# Altium PCB etapa_1.PcbDoc (part 1 of 2)
Units mil, origin at the board's own origin, x right, y up, seen from the top; angles counter-clockwise.
Board outline 2040 x 2040 mil, 4 copper layers (Top Layer, Conexiones, Tierra, Bottom Layer); 184 components, 104 nets, 594 pads, 243 vias.
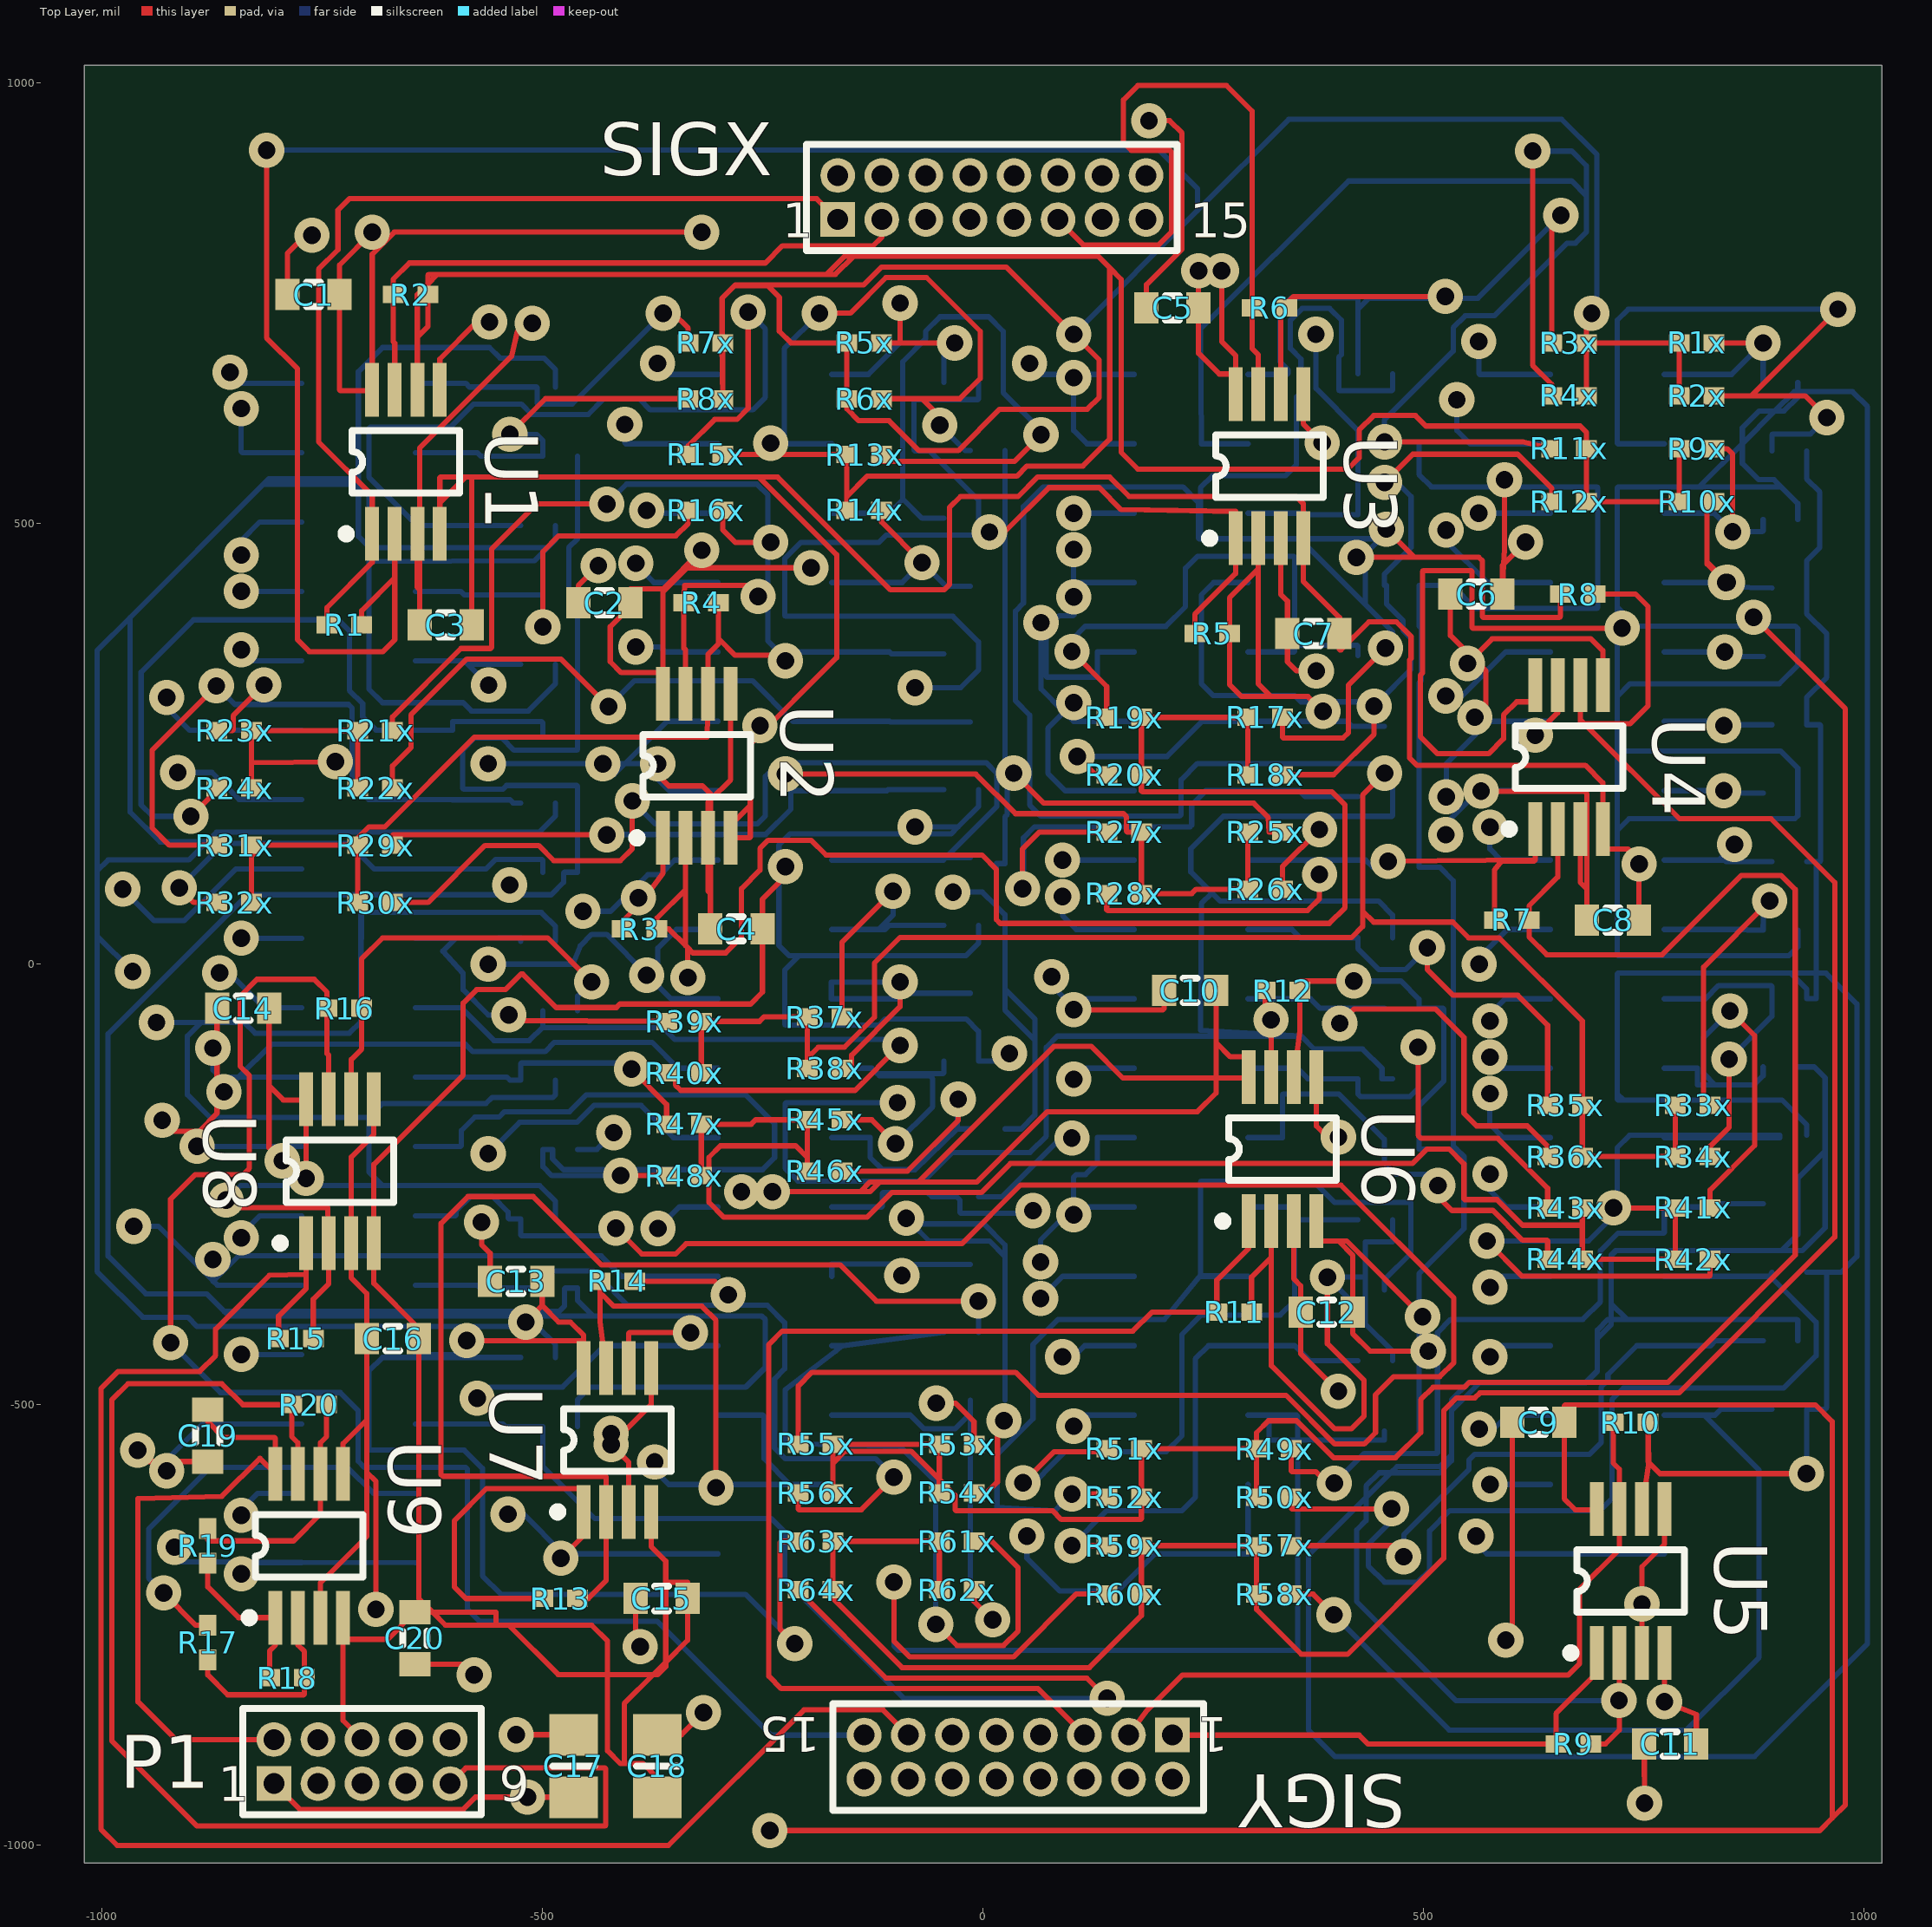
[diagram p0: Top Layer view]
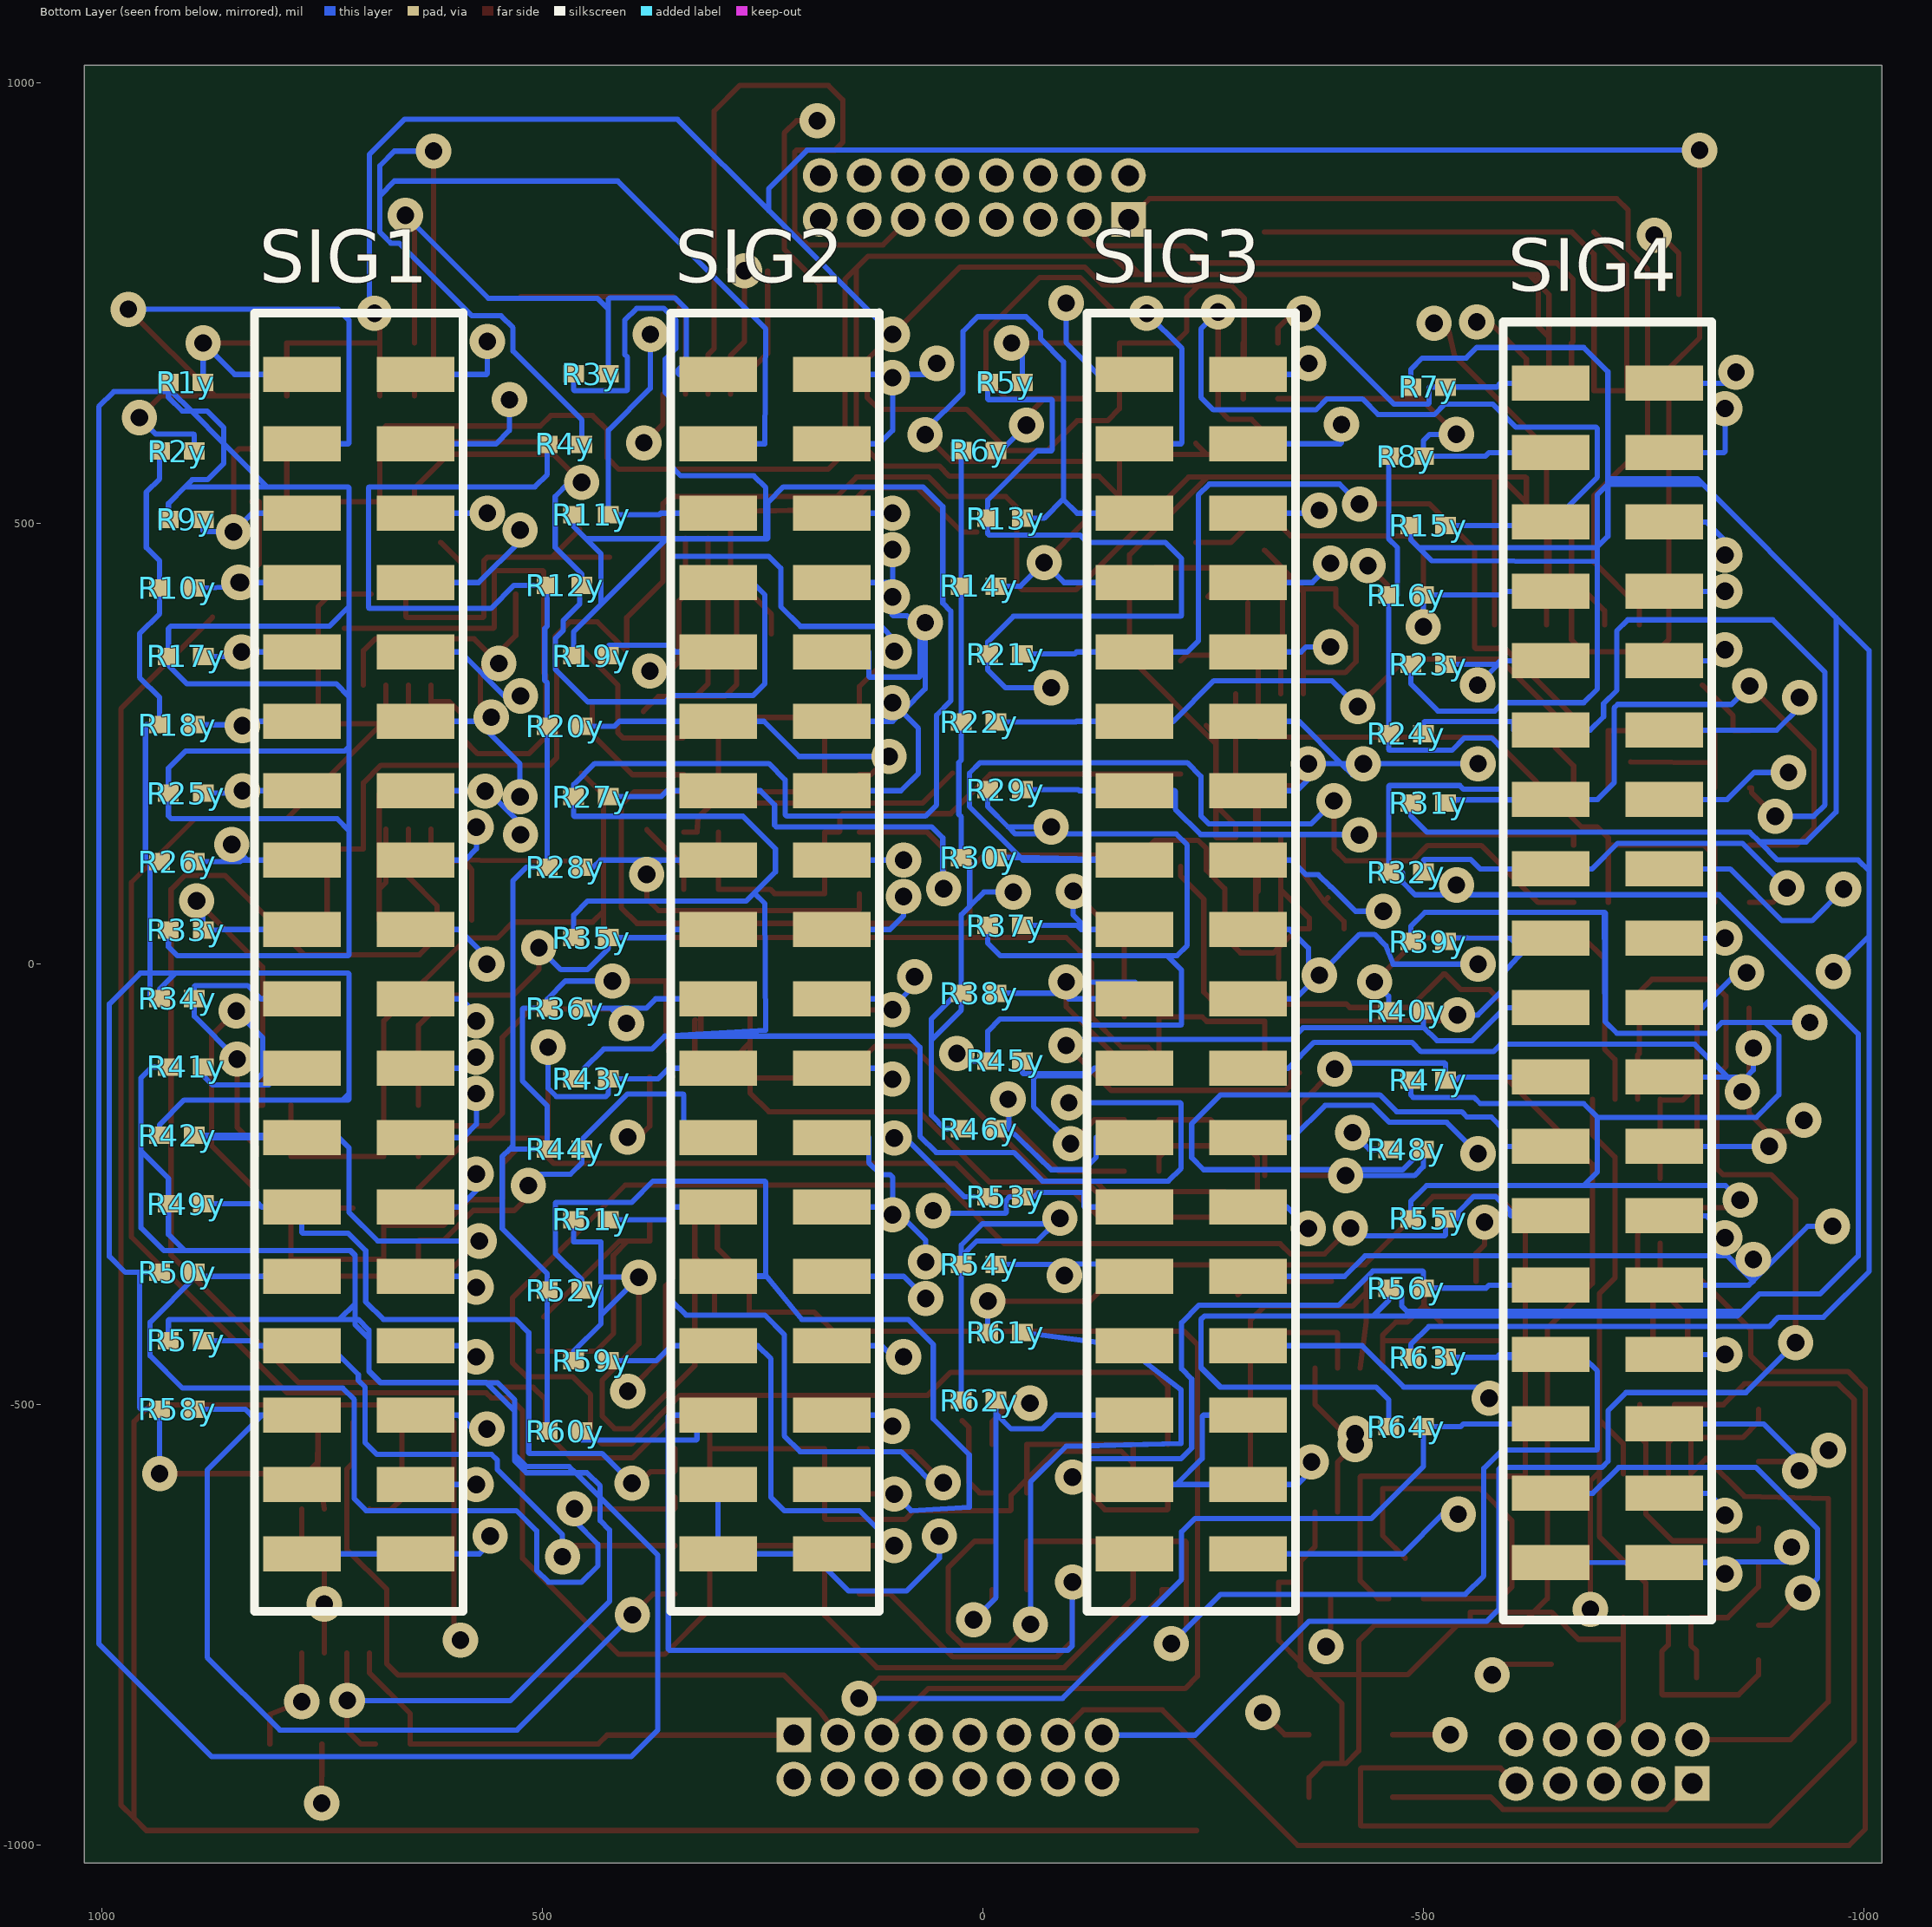
[diagram p1: Bottom Layer view, seen from below]
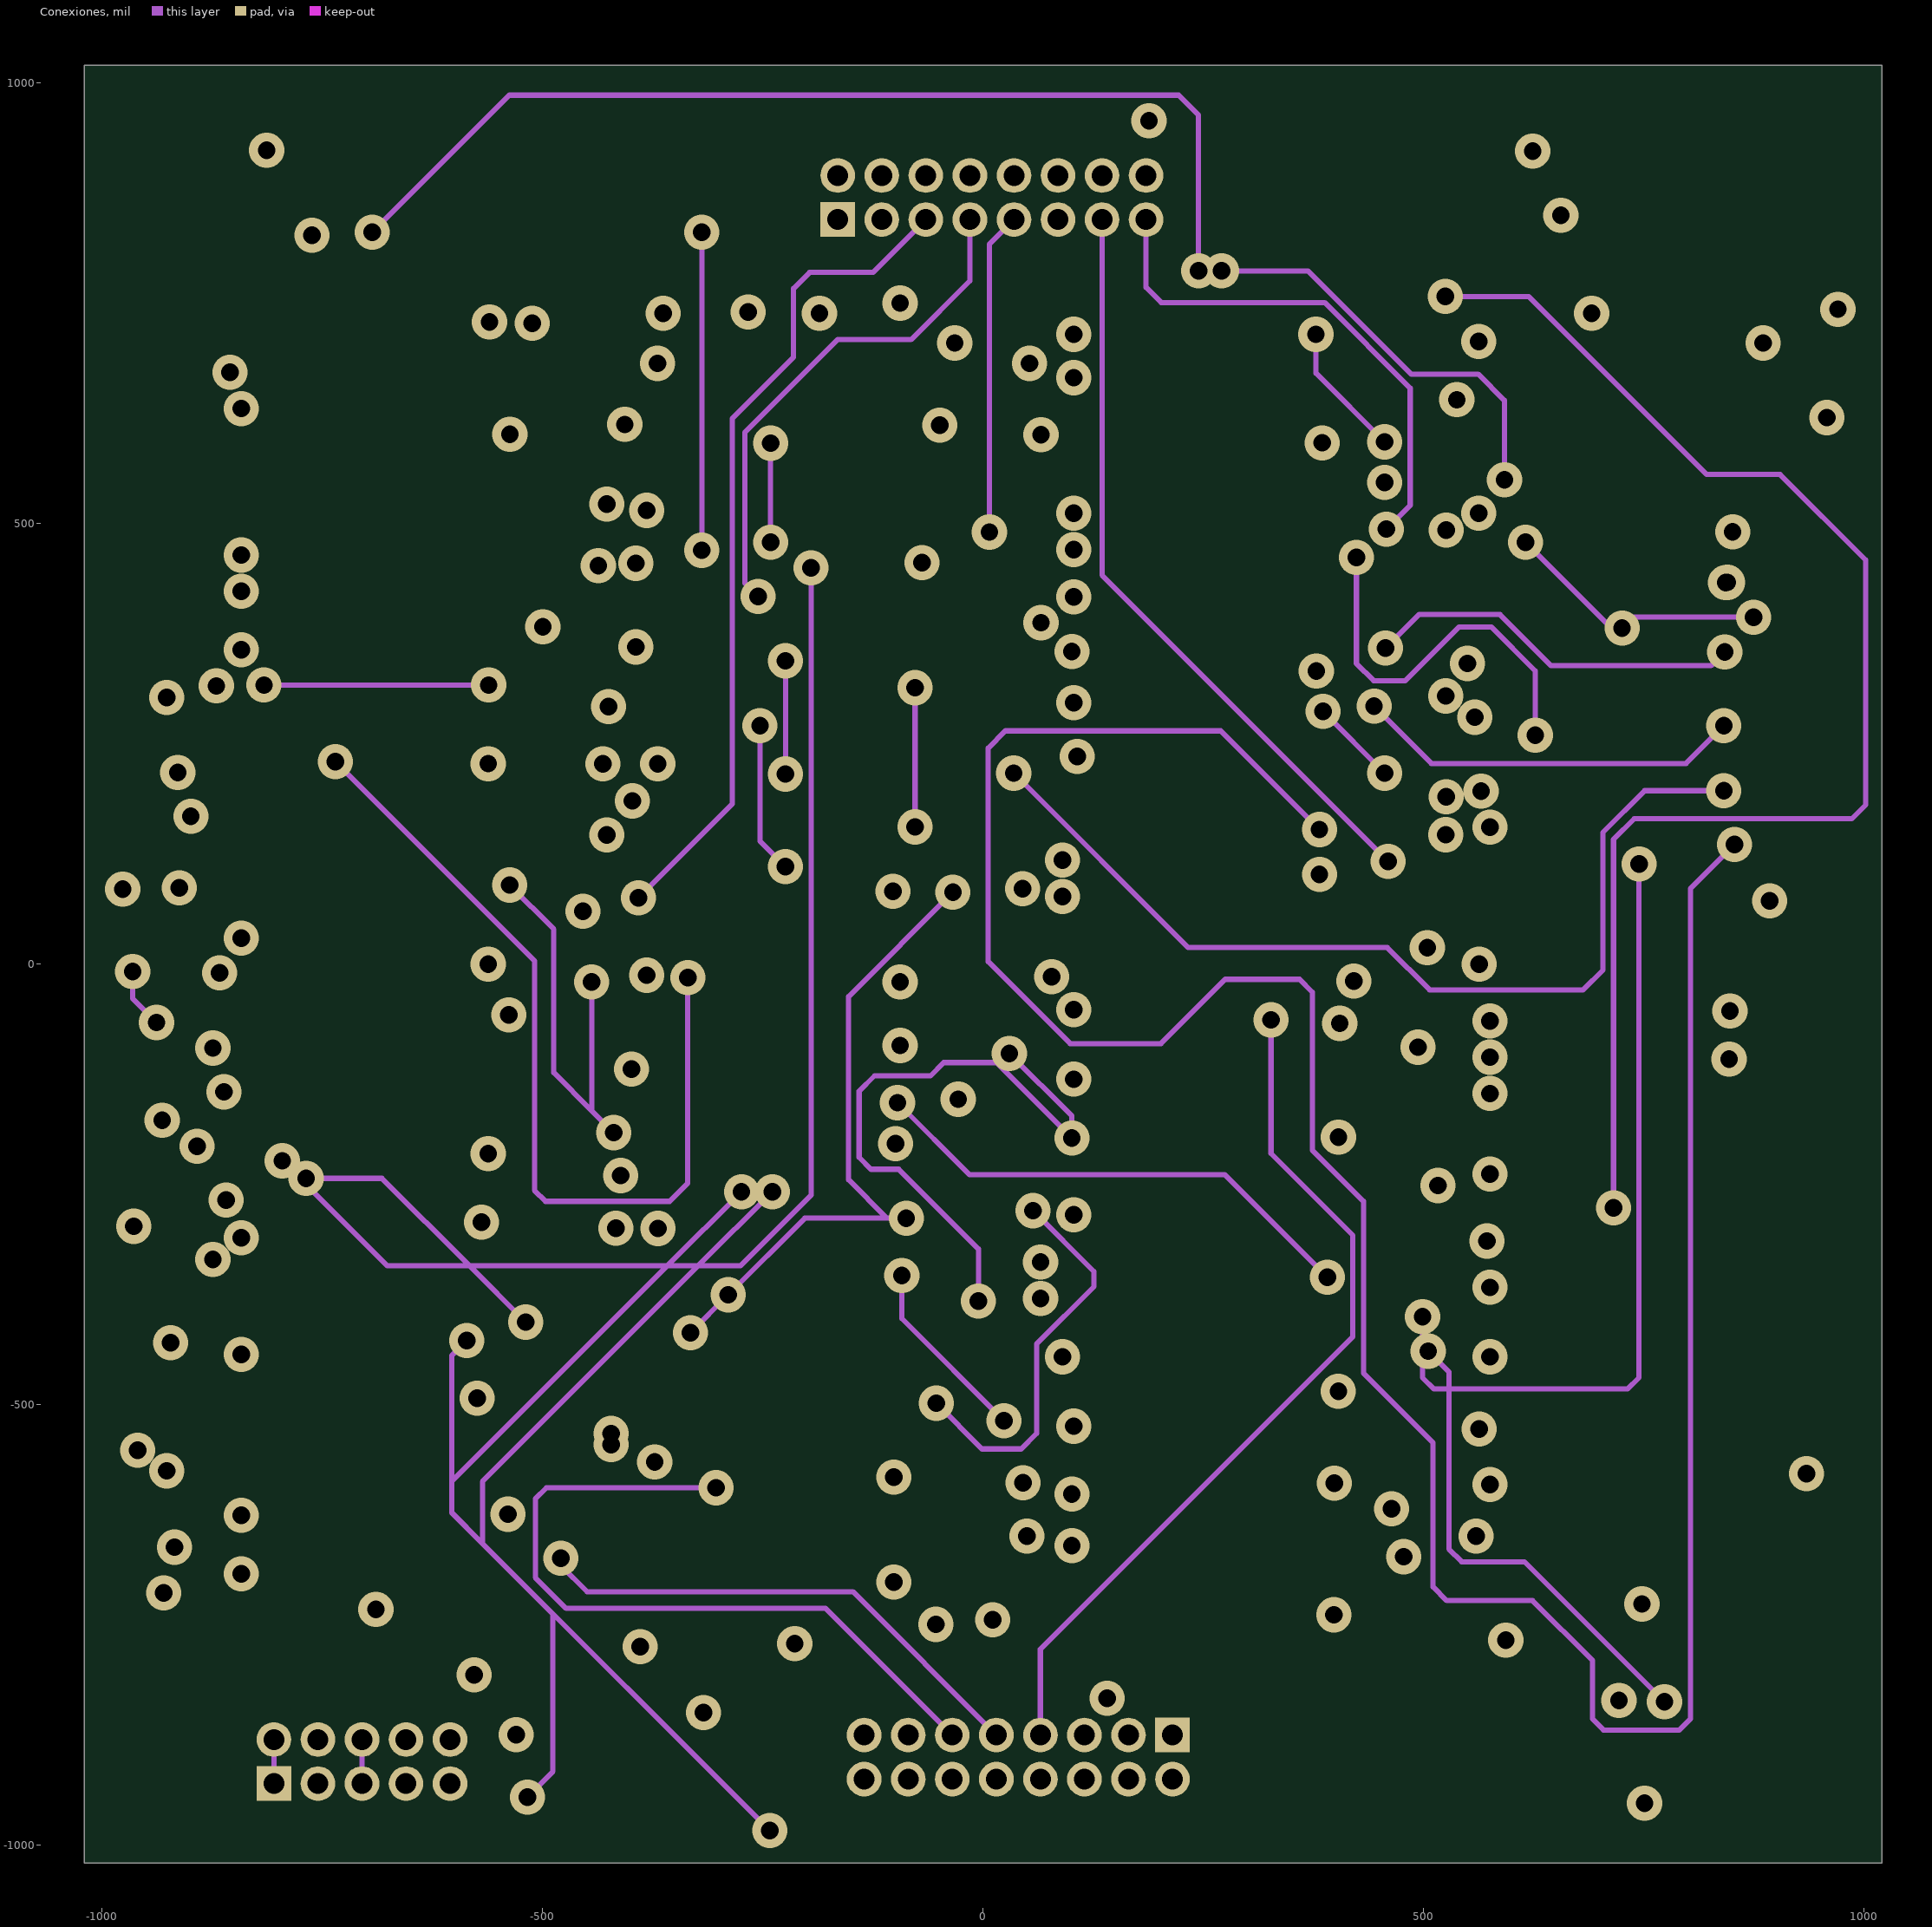
[diagram p2: Conexiones]
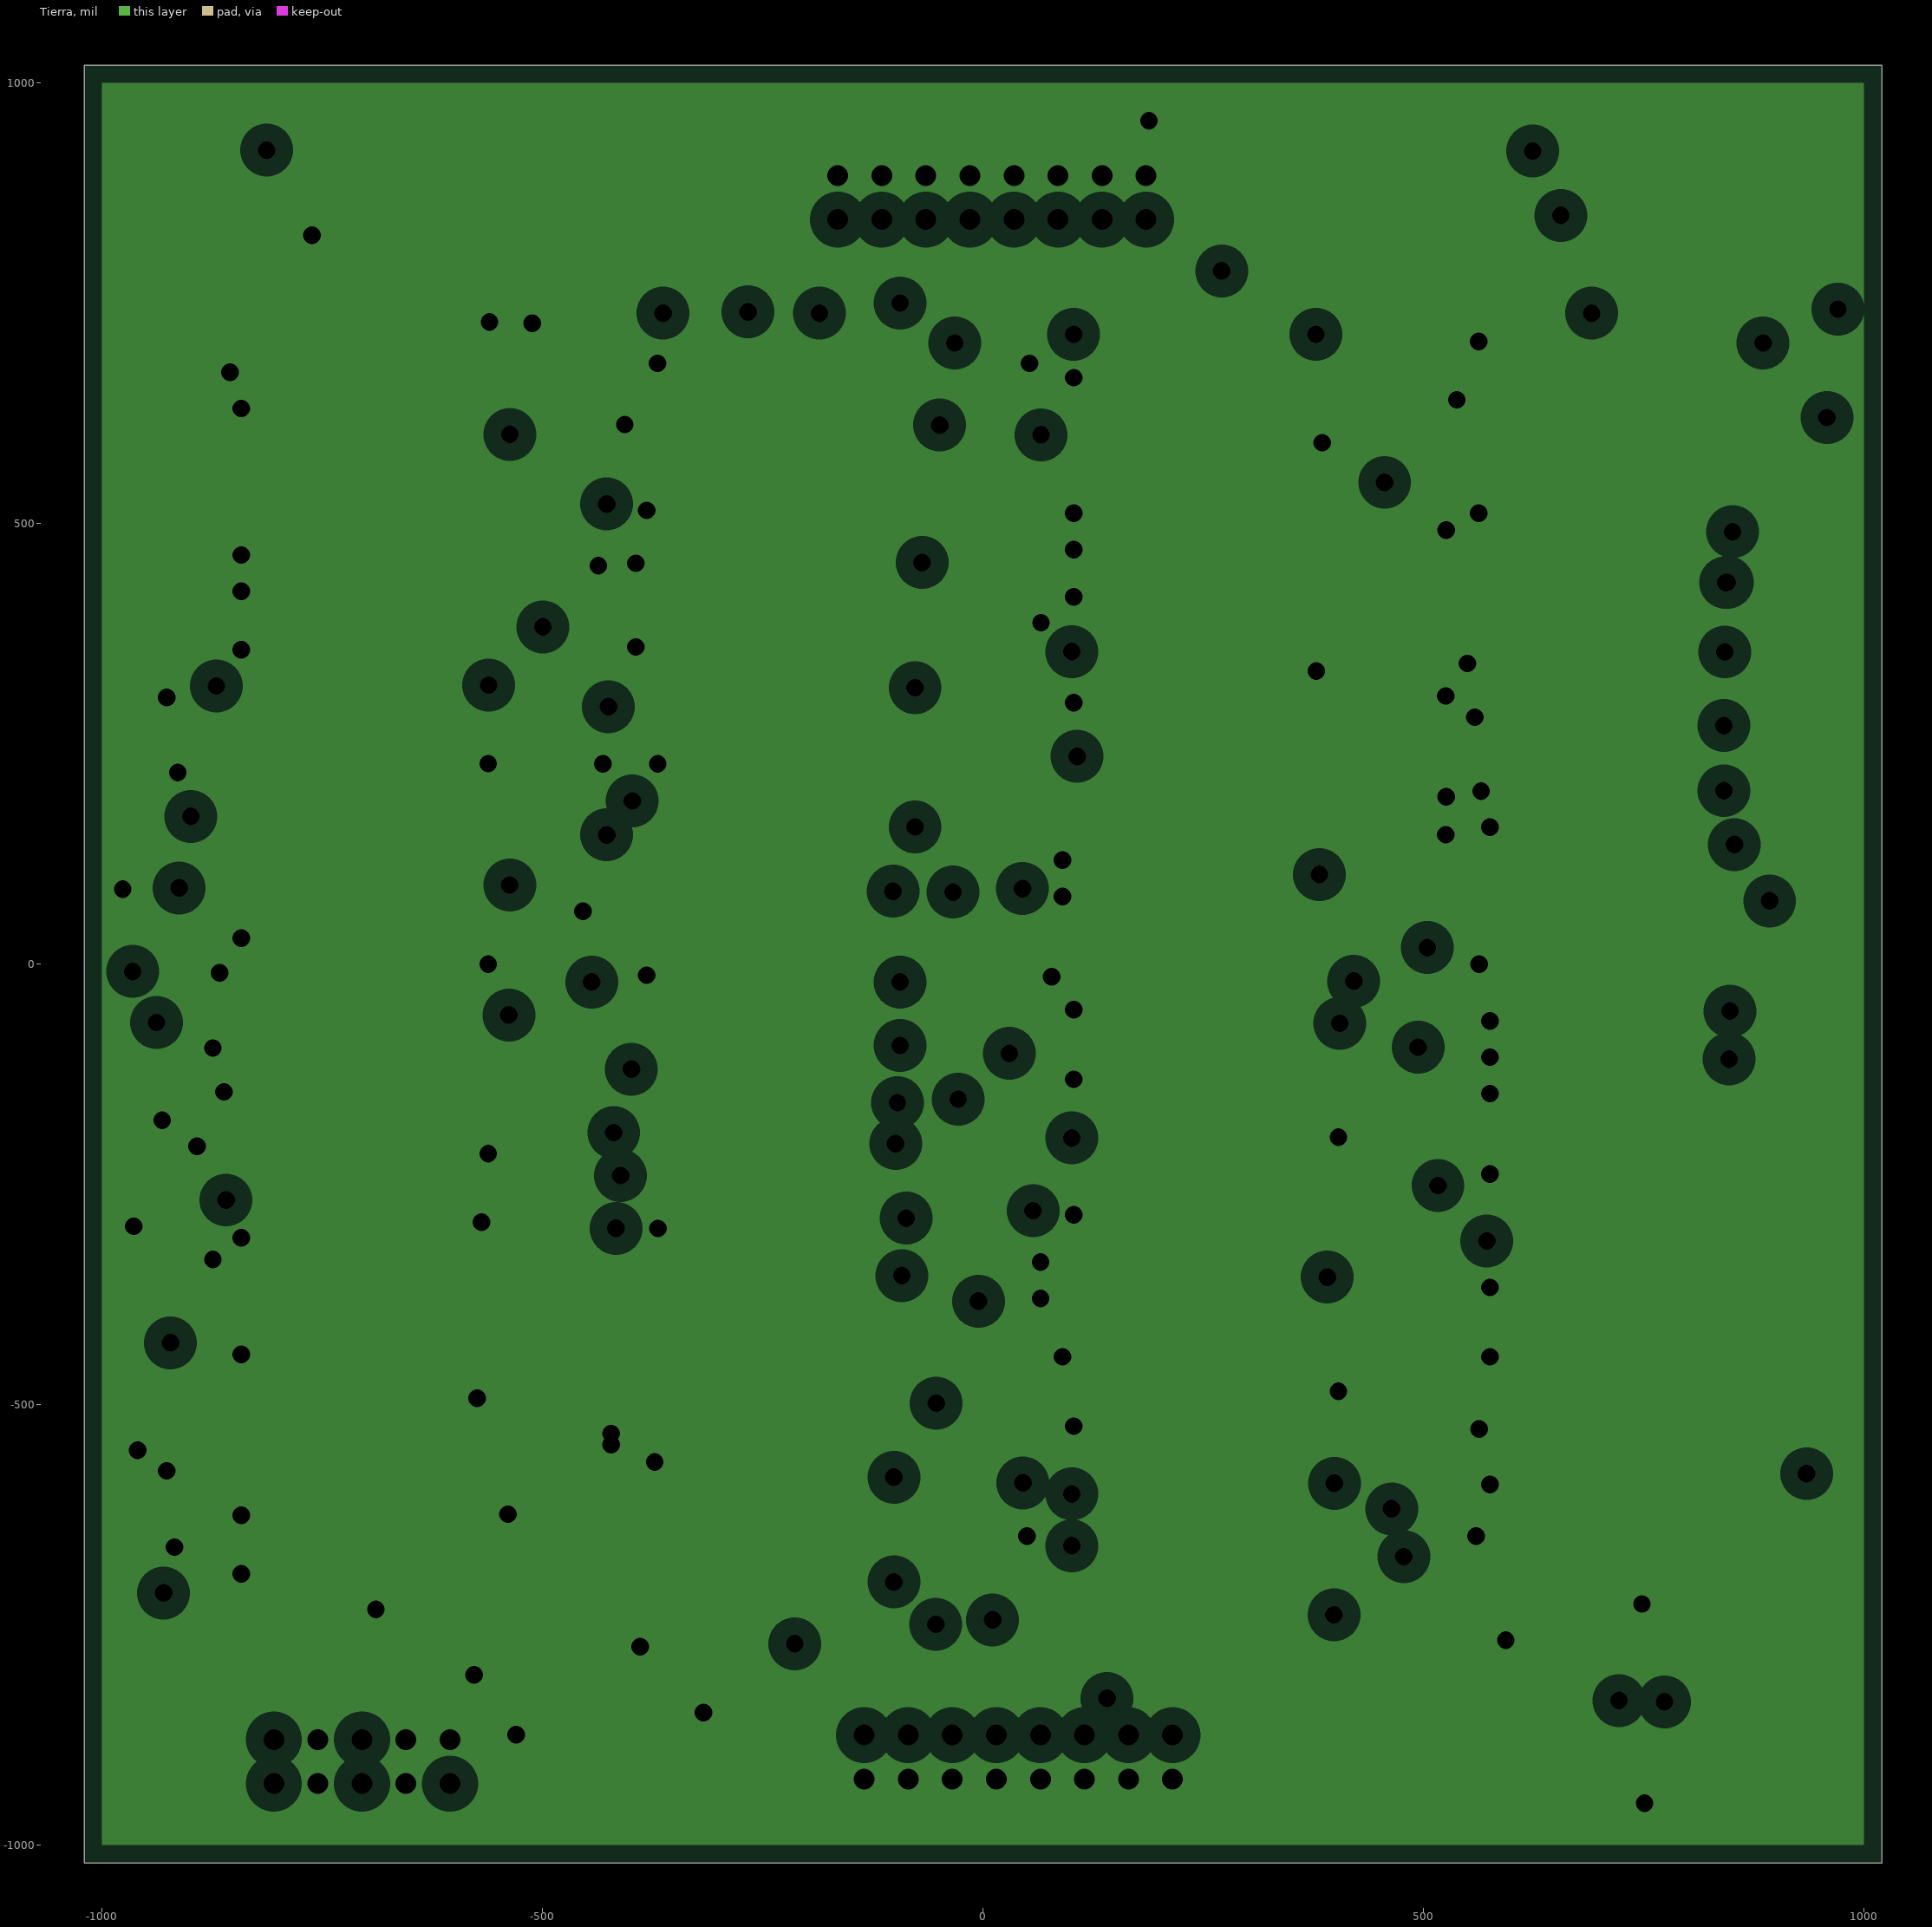
[diagram p3: Tierra, clearances drawn from the general rule]

## Layer stack, top to bottom
Top Layer: signal copper 1.4
Dielectric: core 12.6, FR-4, Dk 4.8
Conexiones: signal copper 1.4
Dielectric: prepreg 12.6, FR-4, Dk 4.8
Tierra: plane copper 1.4, net GND
Dielectric: core 12.6, FR-4, Dk 4.8
Bottom Layer: signal copper 1.4

## Board outline
-1020,-1020 1020,-1020 1020,1020 -1020,1020

## Design rules (kind name [scope] priority, off if disabled: settings)
Clearance [All] p1: gap=6
PlaneClearance [All] p1: clearance=20
PlaneConnect [All] p1: planeconnectstyle=Relief reliefexpansion=20 reliefentries=4 reliefconductorwidth=10 reliefairgap=10
PolygonConnect [All] p1: connectstyle=Relief reliefconductorwidth=10 reliefentries=4 polygonreliefangle="90 Angle"
RoutingTopology [All] p1: topology=Daisy_Balanced
RoutingVias [All] p1: holewidth=20 width=40 viastyle="Through Hole" minholewidth=20 minwidth=40 maxholewidth=20 maxwidth=40
SilkscreenOverComponentPads [All] p1: minsilkscreentomaskgap=10
SolderMaskExpansion SolderMaskExpansion_1 [IsVia] p1: expansion=1
SolderMaskExpansion [All] p2: expansion=4
Width [All] p1: maxlimit=6 minlimit=6 preferedwidth=6 minimp=50.000000 maximp=50.000000 favimp=50.000000
24 further rules are at their usual default settings.

## Classes and differential pairs
component class etapa_1: R1x R1y R2x R2y R3x R3y R4x R4y R5x R5y R6x R6y R7x R7y R8x R8y R9x R9y R10x R10y R11x R11y R12x R12y R13x R13y R14x R14y R15x R15y R16x R16y R17x R17y R18x R18y R19x R19y R20x R20y R21x R21y R22x R22y R23x R23y R24x R24y R25x R25y R26x R26y R27x R27y R28x R28y R29x R29y R30x R30y R31x R31y R32x R32y R33x R33y R34x R34y R35x R35y R36x R36y R37x R37y R38x R38y R39x R39y R40x R40y R41x R41y R42x R42y R43x R43y R44x R44y R45x R45y R46x R46y R47x R47y R48x R48y R49x R49y R50x R50y R51x R51y R52x R52y R53x R53y R54x R54y R55x R55y R56x R56y R57x R57y R58x R58y R59x R59y R60x R60y R61x R61y R62x R62y R63x R63y R64x R64y SIG1 SIG2 SIG3 SIG4
component class etapa1_suma: C1 C2 C3 C4 C5 C6 C7 C8 C9 C10 C11 C12 C13 C14 C15 C16 C17 C18 C19 C20 P1 R1 R2 R3 R4 R5 R6 R7 R8 R9 R10 R11 R12 R13 R14 R15 R16 R17 R18 R19 R20 SIGX SIGY U1 U2 U3 U4 U5 U6 U7 U8 U9

## Components (designator, comment, footprint, x,y, rotation, side; value= is the part's Value field where it differs from the comment)
C1 "Cap" J1-0603 -760,760 r0 top
C2 "Cap" J1-0603 -430,410 r0 top
C3 "Cap" J1-0603 -610,385 r0 top
C4 "Cap" J1-0603 -280,40 r0 top
C5 "Cap" J1-0603 215,745 r0 top
C6 "Cap" J1-0603 560,420 r0 top
C7 "Cap" J1-0603 375,375 r0 top
C8 "Cap" J1-0603 715,50 r0 top
C9 "Cap" J1-0603 630,-520 r0 top
C10 "Cap" J1-0603 235,-30 r0 top
C11 "Cap" J1-0603 780,-885 r0 top
C12 "Cap" J1-0603 390,-395 r0 top
C13 "Cap" J1-0603 -530,-360 r0 top
C14 "Cap" J1-0603 -840,-50 r0 top
C15 "Cap" J1-0603 -365,-720 r0 top
C16 "Cap" J1-0603 -670,-425 r0 top
C17 "Cap Pol3" 6-0805_N -465,-910 r90 top
C18 "Cap Pol3" 6-0805_N -370,-910 r270 top
C19 "Cap" J1-0603 -880,-535 r90 top
C20 "Cap" J1-0603 -645,-765 r90 top
P1 "SFMC-105-L3-S-D" MHDR2X5 -805,-930 r0 top
R1 "Res3" 0402 -725,385 r180 top
R1x "Res3" 0402 810,705 r0 top
R1y "Res3" 0402 905,660 r0 bottom
R2 "Res3" 0402 -650,760 r180 top
R2x "Res3" 0402 810,645 r0 top
R2y "Res3" 0402 915,582.33 r180 bottom
R3 "Res3" 0402 -390,40 r180 top
R3x "Res3" 0402 665,705 r180 top
R3y "Res3" 0402 445,670 r180 bottom
R4 "Res3" 0402 -320,410 r180 top
R4x "Res3" 0402 665,645 r180 top
R4y "Res3" 0402 475,590 r180 bottom
R5 "Res3" 0402 260,375 r180 top
R5x "Res3" 0402 -135,705 r0 top
R5y "Res3" 0402 -25,660 r180 bottom
R6 "Res3" 0402 325,745 r180 top
R6x "Res3" 0402 -135,641.67 r0 top
R6y "Res3" 0402 5,583 r180 bottom
R7 "Res3" 0402 600,50 r180 top
R7x "Res3" 0402 -315,705 r180 top
R7y "Res3" 0402 -505,655 r180 bottom
R8 "Res3" 0402 675,420 r180 top
R8x "Res3" 0402 -315,641.67 r180 top
R8y "Res3" 0402 -480,576.33 r180 bottom
R9 "Res3" 0402 670,-885 r180 top
R9x "Res3" 0402 810,585 r0 top
R9y "Res3" 0402 905,504.67 r180 bottom
R10 "Res3" 0402 735,-520 r180 top
R10x "Res3" 0402 810,525 r0 top
R10y "Res3" 0402 915,427 r180 bottom
R11 "Res3" 0402 285,-395 r180 top
R11x "Res3" 0402 665,585 r180 top
R11y "Res3" 0402 445,510 r180 bottom
R12 "Res3" 0402 340,-30 r180 top
R12x "Res3" 0402 665,525 r180 top
R12y "Res3" 0402 475,430 r180 bottom
R13 "Res3" 0402 -480,-720 r180 top
R13x "Res3" 0402 -135,578.33 r0 top
R13y "Res3" 0402 -25,506 r180 bottom
R14 "Res3" 0402 -415,-360 r180 top
R14x "Res3" 0402 -135,515 r0 top
R14y "Res3" 0402 5,429 r180 bottom
R15 "Res3" 0402 -780,-425 r180 top
R15x "Res3" 0402 -315,578.33 r180 top
R15y "Res3" 0402 -505,497.66 r180 bottom
R16 "Res3" 0402 -725,-50 r180 top
R16x "Res3" 0402 -315,515 r180 top
R16y "Res3" 0402 -480,419 r180 bottom
R17 "Res3" 0402 -880,-770 r90 top
R17x "Res3" 0402 320,280 r0 top
R17y "Res3" 0402 905,349.33 r180 bottom
R18 "Res3" 0402 -790,-810 r180 top
R18x "Res3" 0402 320,215 r0 top
R18y "Res3" 0402 915,271.67 r180 bottom
R19 "Res3" 0402 -880,-660 r90 top
R19x "Res3" 0402 160,280 r180 top
R19y "Res3" 0402 445,350 r180 bottom
R20 "Res3" 0402 -765,-500 r180 top
R20x "Res3" 0402 160,215 r180 top
R20y "Res3" 0402 475,270 r180 bottom
R21x "Res3" 0402 -690,265 r0 top
R21y "Res3" 0402 -25,352 r180 bottom
R22x "Res3" 0402 -690,200 r0 top
R22y "Res3" 0402 5,275 r180 bottom
R23x "Res3" 0402 -850,265 r180 top
R23y "Res3" 0402 -505,340.33 r180 bottom
R24x "Res3" 0402 -850,200 r180 top
R24y "Res3" 0402 -480,261.66 r180 bottom
R25x "Res3" 0402 320,150 r0 top
R25y "Res3" 0402 905,194 r180 bottom
R26x "Res3" 0402 320,85 r0 top
R26y "Res3" 0402 915,116.33 r180 bottom
R27x "Res3" 0402 160,150 r180 top
R27y "Res3" 0402 445,190 r180 bottom
R28x "Res3" 0402 160,80 r180 top
R28y "Res3" 0402 475,110 r180 bottom
R29x "Res3" 0402 -690,135 r0 top
R29y "Res3" 0402 -25,198 r180 bottom
R30x "Res3" 0402 -690,70 r0 top
R30y "Res3" 0402 5,121 r180 bottom
R31x "Res3" 0402 -850,135 r180 top
R31y "Res3" 0402 -505,183 r180 bottom
R32x "Res3" 0402 -850,70 r180 top
R32y "Res3" 0402 -480,104.33 r180 bottom
R33x "Res3" 0402 805.47,-160 r0 top
R33y "Res3" 0402 905,38.67 r180 bottom
R34x "Res3" 0402 805.47,-218.33 r0 top
R34y "Res3" 0402 915,-39 r180 bottom
R35x "Res3" 0402 660.47,-160 r180 top
R35y "Res3" 0402 445,30 r180 bottom
R36x "Res3" 0402 660.47,-218.33 r180 top
R36y "Res3" 0402 475,-50 r180 bottom
R37x "Res3" 0402 -180,-60 r0 top
R37y "Res3" 0402 -25,44 r180 bottom
R38x "Res3" 0402 -180,-118.33 r0 top
R38y "Res3" 0402 5,-33 r180 bottom
R39x "Res3" 0402 -339.53,-65 r180 top
R39y "Res3" 0402 -505,25.67 r180 bottom
R40x "Res3" 0402 -339.53,-123.33 r180 top
R40y "Res3" 0402 -480,-53 r180 bottom
R41x "Res3" 0402 805.47,-276.67 r0 top
R41y "Res3" 0402 905,-116.67 r180 bottom
R42x "Res3" 0402 805.47,-335 r0 top
R42y "Res3" 0402 915,-194.33 r180 bottom
R43x "Res3" 0402 660.47,-276.67 r180 top
R43y "Res3" 0402 445,-130 r180 bottom
R44x "Res3" 0402 660.47,-335 r180 top
R44y "Res3" 0402 475,-210 r180 bottom
R45x "Res3" 0402 -180,-176.67 r0 top
R45y "Res3" 0402 -25,-110 r180 bottom
R46x "Res3" 0402 -180,-235 r0 top
R46y "Res3" 0402 5,-187 r180 bottom
R47x "Res3" 0402 -339.53,-181.67 r180 top
R47y "Res3" 0402 -505,-131.67 r180 bottom
R48x "Res3" 0402 -339.53,-240 r180 top
R48y "Res3" 0402 -480,-210.33 r180 bottom
R49x "Res3" 0402 330,-550 r0 top
R49y "Res3" 0402 905,-272 r180 bottom
R50x "Res3" 0402 330,-605 r0 top
R50y "Res3" 0402 915,-349.67 r180 bottom
R51x "Res3" 0402 160,-550 r180 top
R51y "Res3" 0402 445,-290 r180 bottom
R52x "Res3" 0402 160,-605 r180 top
R52y "Res3" 0402 475,-370 r180 bottom
R53x "Res3" 0402 -30,-545 r0 top
R53y "Res3" 0402 -25,-264 r180 bottom
R54x "Res3" 0402 -30,-600 r0 top
R54y "Res3" 0402 5,-341 r180 bottom
R55x "Res3" 0402 -190,-545 r180 top
R55y "Res3" 0402 -505,-289 r180 bottom
R56x "Res3" 0402 -190,-600 r180 top
R56y "Res3" 0402 -480,-367.67 r180 bottom
R57x "Res3" 0402 330,-660 r0 top
R57y "Res3" 0402 905,-427.33 r180 bottom
R58x "Res3" 0402 330,-715 r0 top
R58y "Res3" 0402 915,-505 r180 bottom
R59x "Res3" 0402 160,-660 r180 top
R59y "Res3" 0402 445,-450 r180 bottom
R60x "Res3" 0402 160,-715 r180 top
R60y "Res3" 0402 475,-530 r180 bottom
R61x "Res3" 0402 -30,-655 r0 top
R61y "Res3" 0402 -25,-418 r180 bottom
R62x "Res3" 0402 -30,-710 r0 top
R62y "Res3" 0402 5,-495 r180 bottom
R63x "Res3" 0402 -190,-655 r180 top
R63y "Res3" 0402 -505,-446.33 r180 bottom
R64x "Res3" 0402 -190,-710 r180 top
R64y "Res3" 0402 -480,-525 r180 bottom
SIG1 "Con_Hamamatsu" SQW-118 708.66,0 r270 bottom locked
SIG2 "Con_Hamamatsu" SQW-118 236.22,0 r270 bottom locked
SIG3 "Con_Hamamatsu" SQW-118 -236.22,0 r270 bottom locked
SIG4 "Con_Hamamatsu" SQW-118 -708.66,-10 r270 bottom locked
SIGX "SFMC-108-L3-S-D" MHDR2X8 -165,845 r0 top
SIGY "SFMC-108-L3-S-D" MHDR2X8 215,-875 r180 top
U1 "AD8056AR" RM-8 -655,570 r0 top
U2 "AD8056AR" RM-8 -325,225 r0 top
U3 "AD8056AR" RM-8 325,565 r0 top
U4 "AD8056AR" RM-8 665,235 r0 top
U5 "AD8056AR" RM-8 735,-700 r0 top
U6 "AD8056AR" RM-8 340,-210 r0 top
U7 "AD8056AR" RM-8 -415,-540 r0 top
U8 "AD8056AR" RM-8 -730,-235 r0 top
U9 "AD8056AR" RM-8 -765,-660 r0 top

## Footprints (in the part's own frame and the unit in brackets; to place one, negate y for a bottom-side part, rotate by r counter-clockwise, add the part's x,y. Pads: shape width x height; smd on the part's side, far side on the other; paste and mask are expansions set on the pad)
6-0805_N [mm] "Chip Resistor, Body 2.0x1.2mm, IPC Medium Density"
  rect 1.2x1.4 smd: 1(-0.9,0) 2(0.9,0)
  silkscreen extent 0,-0.6 0,0.6, body extent -1.07,-0.7 1.07,0.7, height 0.7
0402 [mm] "Chip Capacitor, Body 1.0x0.5mm, IPC High Density"
  rect 0.6x0.5 smd: 1(-0.5,0) 2(0.5,0)
  body extent -0.55,-0.3 0.55,0.3, height 1.3
J1-0603 [mm] "Chip Resistor, Body 1.6x0.8mm, IPC High Density"
  rect 0.7x0.9 smd: 1(-0.75,0) 2(0.75,0)
  silkscreen extent -0.2,-0.35 0.2,0.35, body extent -0.85,-0.48 0.85,0.48, height 0.9
MHDR2X5 [mm] "Connector; Header; 5x2 Position"
  rect 1x1 hole 0.6: 1(0,0)
  round 1 hole 0.6: 2(0,1.27) 3(1.27,0) 4(1.27,1.27) 5(2.54,0) 6(2.54,1.27) 7(3.81,0) 8(3.81,1.27) 9(5.08,0) 10(5.08,1.27)
  silkscreen extent -0.9,-0.9 5.98,2.17
MHDR2X8 [mm] "Connector; Header; 8x2 Position"
  rect 1x1 hole 0.6: 1(0,0)
  round 1 hole 0.6: 2(0,1.27) 3(1.27,0) 4(1.27,1.27) 5(2.54,0) 6(2.54,1.27) 7(3.81,0) 8(3.81,1.27) 9(5.08,0) 10(5.08,1.27) 11(6.35,0) 12(6.35,1.27) 13(7.62,0) 14(7.62,1.27) 15(8.89,0) 16(8.89,1.27)
  silkscreen extent -0.9,-0.9 9.79,2.17
RM-8 [mm] "Shrink Small Outline, MSOP; 8 Leads; Body Width 3 mm; Pitch 0.65 mm"
  rect 0.4x1.55 smd: 1(-0.975,-2.075) 2(-0.325,-2.075) 3(0.325,-2.075) 4(0.975,-2.075) 5(0.975,2.075) 6(0.325,2.075) 7(-0.325,2.075) 8(-0.975,2.075)
  silkscreen extent -1.85,-2.2 1.55,0.9
SQW-118 [mil]
  rect 40x88 smd mask+2: 1(-669.29,-64.5) 2(-669.29,64.5) 3(-590.55,-64.5) 4(-590.55,64.5) 5(-511.81,-64.5) 6(-511.81,64.5) 7(-433.07,-64.5) 8(-433.07,64.5) 9(-354.33,-64.5) 10(-354.33,64.5) 11(-275.59,-64.5) 12(-275.59,64.5) 13(-196.85,-64.5) 14(-196.85,64.5) 15(-118.11,-64.5) 16(-118.11,64.5) 17(-39.37,-64.5) 18(-39.37,64.5) 19(39.37,-64.5) 20(39.37,64.5) 21(118.11,-64.5) 22(118.11,64.5) 23(196.85,-64.5) 24(196.85,64.5) 25(275.59,-64.5) 26(275.59,64.5) 27(354.33,-64.5) 28(354.33,64.5) 29(433.07,-64.5) 30(433.07,64.5) 31(511.81,-64.5) 32(511.81,64.5) 33(590.55,-64.5) 34(590.55,64.5) 35(669.29,-64.5) 36(669.29,64.5)
  silkscreen extent -739,-118 734,118

## Part data
C1 C2 C3 C4 C5 C6 C7 C8 C9 C10 C11 C12 C13 C14 C15 C16 C19 C20: "Capacitor"
C17 C18: "Polarized Capacitor (Surface Mount)"
P1: library part FTR-105-01-D
R1 R1x R1y R2 R2x R2y R3 R3x R3y R4 R4x R4y R5 R5x R5y R6 R6x R6y R7 R7x R7y R8 R8x R8y R9 R9x R9y R10 R10x R10y R11 R11x R11y R12 R12x R12y R13 R13x R13y R14 R14x R14y R15 R15x R15y R16 R16x R16y R17 R17x R17y R18 R18x R18y R19 R19x R19y R20 R20x R20y R21x R21y R22x R22y R23x R23y R24x R24y R25x R25y R26x R26y R27x R27y R28x R28y R29x R29y R30x R30y R31x R31y R32x R32y R33x R33y R34x R34y R35x R35y R36x R36y R37x R37y R38x R38y R39x R39y R40x R40y R41x R41y R42x R42y R43x R43y R44x R44y R45x R45y R46x R46y R47x R47y R48x R48y R49x R49y R50x R50y R51x R51y R52x R52y R53x R53y R54x R54y R55x R55y R56x R56y R57x R57y R58x R58y R59x R59y R60x R60y R61x R61y R62x R62y R63x R63y R64x R64y: "Resistor"
SIGX SIGY: library part FTR-108-01-D
U1 U2 U3 U4 U5 U6 U7 U8 U9: "Low Cost, 300MHz Voltage Feedback Amplifier"

## Via types
v1: diameter 40, hole 20, Top Layer to Bottom Layer, 192 vias
v2: diameter 40, hole 20, Top Layer to Conexiones, 51 vias

## Nets (pads, with @x,y where several pads share a name; then routed paths per layer and width w, separated by ;. In a path a pad name is that pad's centre, name@x,y a point inside that pad or via, vN(x,y) a via of type N, cw(c..) or ccw(c..) an arc to the next point about the centre after c; other vN are vias at no path point)
+5: C1.2 C2.2 C5.2 C6.2 C9.2 C10.2 C13.2 C14.2 C17.1 C19.2 P1.1 P1.2 U1.8 U2.8 U3.8 U4.8 U5.8 U6.8 U7.8 U8.8 U9.8 | length 15170.3
  Top Layer w6: C19.2@-880,-505.47 -880,-519.25 -862,-537.25 -804.39,-537.25 -803.39,-538.25 U9.8@-803.39,-578.31 -820.85,-560.85 -864,-604 -959.25,-606.75 -959.25,-837.25 -916.5,-880 P1.2@-805,-880 ; C14.2@-810.47,-50 -810.47,-138.03 ; P1.1@-805,-930 -775.75,-959.25 -590.07,-959.25 -576.25,-945.43 v2@-517.07,-945.43 ; v2(-795.47,-223.25) -810.47,-208.25 -810.47,-138.03 ; v2(-768.39,-243.12) U8.8@-768.39,-154.25 ; U8.8@-768.39,-153.31 U8.8@-768.39,-154.25 ; v2(-693.25,830.75) -730.47,793.53 C1.2@-730.47,760 -730.47,651.75 -729.47,650.75 -693.39,650.75 U1.8@-693.39,651.69 -693.39,805.75 -668.39,830.75 v2(-319.25,830.75) ; v2(-586.25,-427.25) -453.89,-427.25 -453.39,-427.75 ; v2(-519.25,-406.25) -500.5,-387.5 ; v2(-517.25,-945.25) v2@-517.07,-945.43 ; -500.47,-387.47 C13.2@-500.47,-360 -500.5,-387.5 ; C17.1@-465,-945.43 v2@-517.07,-945.43 ; U7.8@-453.39,-458.31 -453.39,-427.75 ; U2.8@-363.39,306.69 U2.8@-363.39,330.75 ; v2(-319.25,469.75) -363.25,425.75 -400.47,425.75 C2.2@-400.47,410 -400.47,405.75 -423.25,382.97 -423.25,343.25 -410.75,330.75 U2.8@-363.39,330.75 ; v2(-274.25,-258.25) v2(-239.25,-258.25) -139.25,-258.25 ; v2(-242.25,-983.25) 949.75,-983.25 963.75,-969.25 ; v2(-195.25,449.74) -336.26,449.74 -363.39,422.61 U2.8@-363.39,330.75 ; v2(244.53,786.75) C5.2@244.53,745 244.53,693.25 268.03,669.75 U3.8@286.61,669.75 ; C10.2@264.53,-30 264.53,-89.03 ; v1(270.75,786.75) 270.75,706.61 286.61,690.75 U3.8@286.61,669.75 ; U3.8@286.61,646.69 U3.8@286.61,669.75 ; v2(591.75,549.75) 591.75,470.75 591.02,454.02 ; v2(615.75,478.75) 591.02,454.02 ; U4.8@626.61,316.69 626.61,297.75 605.75,297.75 590.75,282.75 590.75,255.75 573.75,238.75 515.75,238.75 496.16,258.33 496.16,327.75 498.75,330.33 498.75,445.75 499.75,446.75 553.75,446.75 554.75,445.75 554.75,382.28 555.75,381.28 v2(725.25,381.28) ; U5.8@696.61,-618.31 696.61,-619.25 672.03,-619.25 659.53,-606.75 C9.2@659.53,-520 659.53,-501.25 660.53,-500.25 944.75,-500.25 963.75,-519.25 963.75,-969.25 ; v2(874.67,393.78) 978.75,289.7 978.75,-954.25 963.75,-969.25 ; -810.47,-138.03 -794.25,-154.25 U8.8@-768.39,-154.25 ; -500.5,-387.5 -481.75,-406.25 -468.31,-406.25 -453.39,-421.18 -453.39,-427.75 ; -139.25,-258.25 -128.25,-258.25 -117.25,-247.25 ; -139.25,-258.25 -128.25,-247.25 -117.25,-247.25 ; -117.25,-247.25 -73.25,-247.25 ; -73.25,-247.25 -7.01,-247.25 72.75,-167.49 243.25,-167.49 264.53,-146.21 264.53,-129.25 ; -73.25,-247.25 80.75,-93.25 122.75,-93.25 158.75,-129.25 264.53,-129.25 ; 264.53,-129.25 301.61,-129.25 U6.8@301.61,-128.31 301.61,-105.25 280.75,-105.25 264.53,-89.03 ; 264.53,-129.25 264.53,-89.03 ; 591.02,454.02 C6.2@589.53,420 589.53,452.53 591.02,454.02
  Conexiones w6: P1.1@-805,-930 P1.2@-805,-880 ; v2(-795.47,-223.25) -676.47,-342.25 -583.25,-342.25 ; v2(-768.39,-243.12) -682.39,-243.12 -583.25,-342.25 ; v2(-693.25,830.75) -537.78,986.22 221.97,986.22 244.53,963.66 v2(244.53,786.75) ; v2(-586.25,-427.25) -603.25,-444.25 -603.25,-587.25 ; v2(-519.25,-406.25) -583.25,-342.25 ; v2(-517.25,-945.25) -488.25,-916.25 -488.25,-737.53 -603.25,-622.53 -603.25,-622.25 ; v2(-319.25,469.75) v2(-319.25,830.75) ; v2(-274.25,-258.25) -358.25,-342.25 ; v2(-242.25,-983.25) -568.25,-657.25 ; v2(-239.25,-258.25) -323.25,-342.25 ; v2(-195.25,449.74) -195.25,-262.25 -275.25,-342.25 -323.25,-342.25 ; v1(270.75,786.75) 368.75,786.75 485.94,669.55 561.94,669.55 591.75,639.75 v2(591.75,549.75) ; v2(615.75,478.75) 713.21,381.28 v2(725.25,381.28) 737.75,393.78 v2(874.67,393.78) ; -603.25,-622.25 -603.25,-587.25 ; -603.25,-622.25 -568.25,-657.25 ; -603.25,-587.25 -358.25,-342.25 ; -583.25,-342.25 -358.25,-342.25 ; -568.25,-657.25 -568.25,-587.25 -323.25,-342.25 ; -358.25,-342.25 -323.25,-342.25
-5: C3.2 C4.2 C7.2 C8.2 C11.2 C12.2 C15.2 C16.2 C18.2 C20.2 P1.5 P1.6 U1.4 U2.4 U3.4 U4.4 U5.4 U6.4 U7.4 U8.4 U9.4 | length 7755.4
  Top Layer w6: U9.4@-726.61,-741.69 U9.4@-726.61,-766.25 ; P1.6@-705,-880 -726.61,-858.39 U9.4@-726.61,-766.25 ; U1.4@-616.61,488.31 -616.61,523.75 ; C3.2@-580.47,385 -580.47,551.75 ; U7.4@-376.61,-621.69 -376.61,-661.25 -360.25,-677.61 -360.25,-701.39 ; C18.2@-370,-945.43 -370,-923.25 -386,-907.25 -407.25,-907.25 ; v2(-253.25,270.75) -264.25,259.75 -264.25,249.75 ; v2(-224.25,110.75) -224.25,99.97 -250.47,73.75 C4.2@-250.47,40 -250.47,-31.75 -263.97,-45.25 -412.25,-45.25 -416.25,-49.25 -484.5,-49.25 -522.5,-11.25 -524.5,-11.25 -542.25,-29 -575,-29 -590.25,-44.25 -590.25,-125.89 -691.61,-227.25 U8.4@-691.61,-316.69 -691.61,-362.25 -640.47,-413.39 C16.2@-640.47,-425 -640.47,-720.03 -625.03,-735.47 ; U6.4@378.39,-291.69 378.39,-314.25 403.38,-314.25 ; v2(498.75,-400.25) 412.75,-314.25 403.38,-314.25 ; v2(505.25,-439.25) 439.53,-439.25 419.53,-419.25 C12.2@419.53,-395 419.53,-373.53 419.75,-373.75 419.75,-330.62 403.38,-314.25 ; C8.2@744.53,50 v2(744.53,113.75) 744.53,118.25 732.03,130.75 703.39,130.75 U4.4@703.39,153.31 703.39,205.75 683.39,225.75 492.25,225.75 484.16,233.83 484.16,345.33 485.75,346.92 485.75,371.82 469.07,388.5 437.83,388.5 406.08,356.75 405.03,356.75 404.53,357.25 C7.2@404.53,375 404.53,393.25 363.39,434.39 U3.4@363.39,483.31 363.39,522.75 355.39,530.75 165.78,530.75 143.72,552.81 61.72,552.81 39.66,530.75 -25.75,530.75 -38.25,518.25 -38.25,430.75 -44.25,424.75 -105.24,424.75 -233.24,552.75 -254.25,552.75 ; U5.4@773.39,-781.69 v1(773.39,-837.2) 809.53,-851.53 C11.2@809.53,-885 ; U9.4@-726.61,-766.25 -675.78,-766.25 C20.2@-645,-735.47 -625.03,-735.47 ; -625.03,-735.47 -610.25,-750.25 -553.03,-750.25 ; -625.03,-735.47 -553.03,-735.47 -553.03,-750.25 ; -616.61,523.75 -616.61,551.75 -615.61,552.75 -587.61,552.75 ; -616.61,523.75 -587.61,552.75 ; -587.61,552.75 -581.47,552.75 ; -581.47,552.75 -580.47,551.75 ; -581.47,552.75 -580.25,552.75 ; -580.47,551.75 -580.47,552.53 -580.25,552.75 ; -580.25,552.75 -254.25,552.75 ; -553.03,-750.25 -538.25,-750.25 ; -538.25,-750.25 -444.25,-750.25 -426.25,-768.25 -426.25,-806.25 ; -538.25,-750.25 -482.25,-806.25 -426.25,-806.25 ; -426.25,-806.25 -426.25,-892.81 -411.81,-907.25 -407.25,-907.25 ; -426.25,-806.25 -374.25,-806.25 ; -407.25,-907.25 -407.25,-839.25 -374.25,-806.25 ; -374.25,-806.25 -369.25,-806.25 -360.25,-797.25 -360.25,-792.25 ; -374.25,-806.25 -360.25,-792.25 ; -360.25,-792.25 -335.47,-767.47 C15.2@-335.47,-720 -335.47,-701.39 -360.25,-701.39 ; -360.25,-792.25 -360.25,-701.39 ; -264.25,180.11 -264.25,249.75 ; -264.25,180.11 -286.61,157.75 U2.4@-286.61,143.31 -265.25,143.31 -264.25,144.31 -264.25,180.11 ; -264.25,249.75 -166.25,347.75 -166.25,464.75 -254.25,552.75
  Conexiones w6: P1.5@-705,-930 P1.6@-705,-880 ; v2(-253.25,270.75) -253.25,139.75 v2(-224.25,110.75) ; v2(498.75,-400.25) 498.75,-469.25 511.75,-482.25 528.75,-482.25 ; v2(505.25,-439.25) 528.75,-462.75 528.75,-482.25 ; v2(744.53,113.75) 744.53,-469.25 731.53,-482.25 528.75,-482.25 ; v1(773.39,-837.2) 614.43,-678.25 543.25,-678.25 528.75,-663.75 528.75,-482.25
GND: C1.1 C2.1 C3.1 C4.1 C5.1 C6.1 C7.1 C8.1 C9.1 C10.1 C11.1 C12.1 C13.1 C14.1 C15.1 C16.1 C17.2 C18.1 C19.1 C20.1 P1.3 P1.4 P1.7 P1.8 P1.10 SIG1.2 SIG1.4 SIG1.6 SIG1.8 SIG1.10 SIG1.12 SIG1.14 SIG1.16 SIG1.18 SIG1.20 SIG1.22 SIG1.24 SIG1.26 SIG1.28 SIG1.30 SIG1.32 SIG1.34 SIG1.35 SIG1.36 SIG2.2 SIG2.4 SIG2.6 SIG2.8 SIG2.10 SIG2.12 SIG2.14 SIG2.16 SIG2.18 SIG2.20 SIG2.22 SIG2.24 SIG2.26 SIG2.28 SIG2.30 SIG2.32 SIG2.33 SIG2.35 SIG2.36 SIG3.2 SIG3.4 SIG3.6 SIG3.8 SIG3.10 SIG3.12 SIG3.14 SIG3.16 SIG3.18 SIG3.20 SIG3.22 SIG3.24 SIG3.26 SIG3.28 SIG3.30 SIG3.32 SIG3.33 SIG3.34 SIG3.36 SIG4.2 SIG4.4 SIG4.6 SIG4.8 SIG4.10 SIG4.12 SIG4.14 SIG4.16 SIG4.18 SIG4.20 SIG4.22 SIG4.24 SIG4.26 SIG4.28 SIG4.30 SIG4.32 SIG4.34 SIG4.35 SIG4.36 SIGX.2 SIGX.4 SIGX.6 SIGX.8 SIGX.10 SIGX.12 SIGX.14 SIGX.16 SIGY.2 SIGY.4 SIGY.6 SIGY.8 SIGY.10 SIGY.12 SIGY.14 SIGY.16 U1.3 U1.5 U2.3 U2.5 U3.3 U3.5 U4.3 U4.5 U5.3 U5.5 U6.3 U6.5 U7.3 U7.5 U8.3 U8.5 U9.3 U9.5 | length 16146.7
  Top Layer w6: v1(-959.72,-551.75) -959.72,-563.25 -958.44,-564.53 C19.1@-880,-564.53 ; v1(-931.75,-177.22) -931.75,-188.25 -930.29,-189.72 -889.99,-189.72 -869.53,-169.25 C14.1@-869.53,-50 ; C1.1@-789.53,760 -789.53,806.94 -769.25,827.22 v1(-761.75,827.22) ; U9.3@-752.2,-741.69 -752.2,-702.25 -699.53,-649.58 -699.53,-576.57 ; U9.5@-726.61,-578.31 -726.61,-544.25 -699.53,-517.17 ; U8.5@-691.61,-153.31 -691.61,-193.25 -717.2,-218.84 U8.3@-717.2,-316.69 -717.2,-356.25 -699.53,-373.93 C16.1@-699.53,-425 -699.53,-517.17 ; v1(-689.25,-732.22) -689.25,-586.85 -699.53,-576.57 ; C20.1@-645,-794.53 -590.01,-794.53 v1(-577.78,-806.75) ; U1.3@-642.2,488.31 -642.2,427.75 -639.53,425.07 ; C3.1@-639.53,385 -639.53,425.07 ; U1.5@-616.61,651.69 -616.61,686.75 -574.61,728.75 v1(-560.25,728.75) ; v1(-569.25,-292.78) -569.25,-318.43 -559.53,-328.15 C13.1@-559.53,-360 ; v1(-530.06,-874.57) C17.2@-465,-874.57 ; v1(-511.75,727.25) -519.25,727.25 -528.75,717.75 -535.31,689.97 -639.53,585.75 -639.53,425.07 ; C2.1@-459.53,410 -459.53,429.44 v1(-436.75,452.22) ; v1(-422.25,-532.75) v1(-422.25,-545.25) ; U7.3@-402.2,-621.69 -402.2,-565.3 v1(-422.25,-545.25) ; C15.1@-394.53,-720 -394.53,-769.44 v1(-389.25,-774.72) ; U7.5@-376.61,-458.31 -376.61,-499.61 v1(-422.25,-545.25) ; C18.1@-370,-874.57 -342.44,-874.57 v1(-317.44,-849.57) ; v1(-369.25,227.25) -369.25,214.75 -356.75,202.25 -318.53,202.25 -309.53,193.25 -309.53,186.42 ; C4.1@-309.53,40 -309.53,80.07 ; U2.5@-286.61,306.69 -286.61,209.34 -309.53,186.42 ; v1(102.75,-51.75) 203.97,-51.75 205.47,-50.25 C10.1@205.47,-30 ; C5.1@185.47,745 185.47,771.2 225.69,811.42 225.69,943.25 211.72,957.22 v1(188.25,957.22) ; U3.3@337.8,483.31 337.8,419.75 345.47,412.07 C7.1@345.47,375 345.47,343.06 355.75,332.78 v1(378.25,332.78) ; U6.3@352.8,-291.69 352.8,-357.25 360.47,-364.93 C12.1@360.47,-395 360.47,-441.94 v1(403.25,-484.72) ; U3.5@363.39,646.69 363.39,613.29 v1(385,591.68) ; U6.5@378.39,-128.31 378.39,-183.82 390.89,-196.32 v1(403.39,-196.32) ; C6.1@530.47,420 530.47,372.91 v1@555.94,347.44 ; v1(549.75,341.25) v1@555.94,347.44 ; v1(558.25,280.28) 558.25,267.78 570.75,280.28 570.75,332.63 v1@555.94,347.44 ; v1(565.25,196.25) 682.47,196.25 685.47,193.25 685.47,85.07 ; v1(593.25,-767.22) 600.47,-759.99 C9.1@600.47,-520 ; U4.3@677.8,153.31 677.8,92.75 685.47,85.07 ; C8.1@685.47,50 685.47,85.07 ; U4.5@703.39,316.69 703.39,355.75 689.85,369.28 577.78,369.28 v1@555.94,347.44 ; U5.3@747.8,-781.69 v1(747.8,-726.18) 747.8,-683.84 773.39,-658.25 U5.5@773.39,-618.31 ; C11.1@750.47,-885 750.47,-921.57 750.75,-921.85 v1(750.75,-952.22) ; -699.53,-576.57 -699.53,-517.17 ; v1(-389.25,-774.72) -376.75,-787.22 -388.25,-787.22 -389.25,-786.22 v1(-389.25,-774.72) ; -309.53,80.07 -309.53,186.42 ; -309.53,80.07 -312.2,82.75 U2.3@-312.2,143.31 -312.2,183.75 -309.53,186.42
  Bottom Layer w6: v1(-976.66,85) -940.91,49.25 -906.75,49.25 -847.89,108.11 SIG4.16@-773.16,108.11 ; v1(-964.16,-297.5) -936.08,-297.5 -874.22,-359.36 ; v1(-926.66,-575) -926.66,-562.5 -885.97,-521.81 SIG4.32@-773.16,-521.81 ; v1(-926.66,302.5) -926.66,291.41 -900.84,265.59 SIG4.12@-773.16,265.59 ; v1(-917.66,-661.75) -917.66,-678.25 -842.11,-678.54 -773.16,-678.8 SIG4.35@-644.16,-679.29 ; v1(-914.16,217.5) -875.23,217.5 -844.58,186.85 SIG4.14@-773.16,186.85 ; v1(-892.16,-206.85) SIG4.24@-773.16,-206.85 ; v1(-874.25,-95.25) -874.25,-120.25 -866.39,-128.11 -844.83,-128.11 ; v1(-874.22,-335) -874.22,-359.36 ; v1(-866.66,-10) -855.84,-10 -816.47,-49.37 SIG4.20@-773.16,-49.37 ; v1(-861.72,-145) -844.83,-128.11 ; v1(-854.66,671.79) -854.66,660.7 -853.25,659.29 SIG4.2@-773.16,659.29 ; v1(-842.16,-691.79) -829.66,-679.29 SIG4.36@-773.16,-679.29 ; v1(-842.16,-625.55) -842.16,-619.25 -823.46,-600.55 SIG4.34@-773.16,-600.55 ; v1(-842.16,-443.07) SIG4.30@-773.16,-443.07 ; v1(-842.16,-310.59) -842.16,-306.75 -821,-285.59 SIG4.26@-773.16,-285.59 ; v1(-842.16,29.37) SIG4.18@-773.16,29.37 ; v1(-842.16,356.83) -842.16,345.75 -840.74,344.33 SIG4.10@-773.16,344.33 ; v1(-842.16,423.07) SIG4.8@-773.16,423.07 ; v1(-842.16,464.31) -842.16,480.75 -821.1,501.81 SIG4.6@-773.16,501.81 ; v1(-842.16,630.55) -842.16,581.75 -840.97,580.55 SIG4.4@-773.16,580.55 ; SIG4.28@-773.16,-364.33 -869.25,-364.33 -873.9,-359.68 ; SIG4.22@-773.16,-128.11 -844.83,-128.11 ; v1(-574.22,-492.5) -561.72,-480 -477.18,-480 -430.25,-433.07 SIG3.30@-300.72,-433.07 ; v1(-561.72,-215) -526.21,-179.49 -460.99,-179.49 -441.75,-160.25 -388.21,-160.25 -351.61,-196.85 SIG3.24@-300.72,-196.85 ; v1(-561.72,0) -465.5,0 -457.25,20.75 -444.25,33.75 -427.25,33.75 v1@-381.36,-12.14 ; v1(-561.72,227.5) -406.72,227.5 ; v1(-539.22,-624.25) -521.72,-624.25 -476.68,-669.29 SIG3.36@-300.72,-669.29 ; v1(-454.22,60) -422.77,60 -394.81,87.95 -394.25,87.95 -380.65,101.56 -366.68,101.56 -350.13,118.11 SIG3.16@-300.72,118.11 ; v1(-431.72,227.5) -431.72,216.47 -430.25,215 -419.22,215 -406.72,227.5 ; v1(-406.72,612.5) -406.72,591.75 -405.52,590.55 SIG3.4@-300.72,590.55 ; v1(-394.22,360) -366.55,360 -360.88,354.33 SIG3.10@-300.72,354.33 ; v1(-394.22,455) -394.22,453.58 -373.71,433.07 SIG3.8@-300.72,433.07 ; v1(-381.72,-12.5) v1@-381.36,-12.14 ; v1(-381.72,515) -381.72,513.28 -380.25,511.81 SIG3.6@-300.72,511.81 ; v1(-372.72,-565) -372.72,-574.58 -356.75,-590.55 SIG3.34@-300.72,-590.55 -219.25,-590.55 ; v1(-369.72,681.79) -369.72,670.75 -368.26,669.29 SIG3.2@-300.72,669.29 ; v1(-369.22,-300) -344.81,-275.59 SIG3.26@-300.72,-275.59 ; SIG3.32@-300.72,-511.81 -250.16,-511.81 -248.72,-513.25 -248.72,-561.08 -219.25,-590.55 ; SIG3.28@-300.72,-354.33 -410.22,-354.33 -433.55,-331 -845.22,-331 -873.9,-359.68 ; SIG3.22@-300.72,-118.11 -346.35,-118.11 -375.71,-88.75 -486.75,-88.75 -497.25,-99.25 -579.25,-99.25 -587.5,-91 -807.72,-91 -844.83,-128.11 ; SIG3.20@-300.72,-39.37 -354.13,-39.37 v1@-381.36,-12.14 ; SIG3.18@-300.72,39.37 -348.1,39.37 -369.22,18.25 -369.22,0 v1@-381.36,-12.14 ; SIG3.14@-300.72,196.85 -356.19,196.85 -386.84,227.5 -406.72,227.5 ; SIG3.12@-300.72,275.59 -358.63,275.59 -406.72,227.5 ; SIG3.33@-171.72,-590.55 -219.25,-590.55 ; v1(49.72,-649.25) 49.72,-674.25 86.72,-711.25 152.97,-711.25 SIG2.36@194.93,-669.29 ; v1(52.72,681.79) 52.72,670.32 53.75,669.29 SIG2.2@171.72,669.29 ; v1(65.22,-379.33) 90.22,-354.33 SIG2.28@171.72,-354.33 ; v1(65.22,-338.09) 65.22,-313.09 v1@102.72,-275.59 ; v1(65.72,387.5) 65.72,312.5 v1@90.22,288 ; v1(77.72,-14.37) 77.72,-23.84 93.25,-39.37 SIG2.20@171.72,-39.37 ; v1(90.22,-445.57) 90.22,-458.07 115.22,-433.07 SIG2.30@171.72,-433.07 ; v1(90.22,76.87) 90.22,54.9 105.75,39.37 SIG2.18@171.72,39.37 ; v1(90.22,118.11) SIG2.16@171.72,118.11 ; v1(102.72,-524.31) 115.22,-511.81 SIG2.32@171.72,-511.81 ; v1(102.72,-284.35) v1@102.72,-275.59 ; v1(102.72,-130.61) 115.22,-118.11 SIG2.22@171.72,-118.11 ; v1(102.72,296.85) 91.32,296.85 90.22,295.75 v1@90.22,288 ; v1(102.72,416.83) 102.72,404.33 103.47,403.58 103.47,396.75 102.05,395.33 86.33,395.33 71.75,380.75 71.75,326.75 72.75,325.75 128.75,325.75 129.75,326.75 129.75,354.33 SIG2.10@171.72,354.33 ; v1(102.72,470.57) 102.72,434.1 103.75,433.07 SIG2.8@171.72,433.07 ; v1(102.72,511.81) 102.72,499.31 115.22,511.81 SIG2.6@171.72,511.81 ; v1(102.72,665.55) 102.72,605.75 117.92,590.55 SIG2.4@171.72,590.55 ; SIG2.36@171.72,-669.29 SIG2.36@194.93,-669.29 ; SIG2.26@171.72,-275.59 v1@102.72,-275.59 ; SIG2.24@171.72,-196.85 129.75,-196.85 129.75,-225.25 116.25,-238.75 105.75,-238.75 102.72,-241.78 v1@102.72,-275.59 ; SIG2.14@171.72,196.85 93.25,196.85 73.5,216.6 73.5,267.63 90.22,284.35 v1@90.22,288 ; SIG2.12@171.72,275.59 102.63,275.59 v1@90.22,288 ; 300.72,-630.28 SIG2.35@300.72,-669.29 SIG2.36@194.93,-669.29 ; 300.75,-630.25 SIG2.33@300.72,-590.55 ; v1(525.16,146.85) 525.16,159.35 562.66,196.85 SIG1.14@644.16,196.85 ; v1(525.16,304.33) 543.25,304.33 593.25,354.33 SIG1.10@644.16,354.33 ; v1(525.66,190) 525.66,227.5 573.75,275.59 SIG1.12@644.16,275.59 ; v1(525.66,492.5) 525.66,480 572.59,433.07 SIG1.8@644.16,433.07 ; v1(537.66,640.55) 537.66,605.75 552.86,590.55 SIG1.4@644.16,590.55 ; v1(559.66,-649.25) 559.66,-657.29 571.66,-669.29 SIG1.36@644.16,-669.29 SIG1.35@773.16,-669.29 ; v1(562.66,511.81) 562.66,499.31 575.16,511.81 SIG1.6@644.16,511.81 ; v1(562.66,706.79) 562.66,670.38 563.75,669.29 SIG1.2@644.16,669.29 ; v1(563.16,-527.5) 563.16,-536.09 565.32,-538.25 568.82,-538.25 595.26,-511.81 SIG1.32@644.16,-511.81 ; v1(563.16,0) 563.16,7.41 595.12,39.37 SIG1.18@644.16,39.37 ; v1(575.16,-590.55) 575.16,-603.05 587.66,-590.55 SIG1.34@644.16,-590.55 ; v1(575.16,-445.57) 587.66,-433.07 SIG1.30@644.16,-433.07 ; v1(575.16,-366.83) 587.66,-354.33 SIG1.28@644.16,-354.33 ; v1(575.16,-238.09) 575.16,-256.75 594,-275.59 SIG1.26@644.16,-275.59 ; v1(575.16,-146.85) 575.16,-181.75 590.26,-196.85 SIG1.24@644.16,-196.85 ; v1(575.16,-105.61) 575.16,-116.52 576.75,-118.11 SIG1.22@644.16,-118.11 ; v1(575.16,-64.37) 575.16,-56.75 592.54,-39.37 SIG1.20@644.16,-39.37 ; v1(575.16,155.61) 575.16,130.75 587.8,118.11 SIG1.16@644.16,118.11 ; -874.22,-359.36 -874.22,-360 -873.9,-359.68 ; -874.22,-359.36 -873.9,-359.68
NetP1_9: P1.9 R20.2 U9.7 | length 1539.4
  Top Layer w6: U9.7@-777.8,-578.31 -777.8,-543.25 -784.69,-536.36 R20.2@-784.69,-500 -840.25,-500 -864,-476.25 -970.72,-476.25 -988.72,-494.25 -988.72,-881.79 -892.25,-978.25 -429.25,-978.25 -428.25,-977.25 -428.25,-913.25 -429.25,-912.25 -587.25,-912.25 P1.9@-605,-930
NetR1_1: R1.1 R1x.1 R2x.1 R3x.1 R4x.1 R5x.1 R6x.1 R7x.1 R8x.1 U1.2 | length 4427.3
  Top Layer w6: v1(-813.25,923.75) -813.25,710.75 -778.25,675.75 -778.25,368.25 -764.75,354.75 -681.3,354.75 -667.8,368.25 -667.8,438.7 ; R1.1@-705.31,385 -705.31,401.19 -667.8,438.7 ; U1.2@-667.8,488.31 -667.8,438.7 ; R4x.1@684.69,645 R3x.1@684.69,705 ; v1(690.75,738.75) 684.69,732.69 R3x.1@684.69,705 ; R2x.1@790.32,645 R1x.1@790.32,705 R3x.1@684.69,705 ; R7x.1@-296.25,705 R7x.1@-296.25,705.69 ; R7x.1@-296.24,704.99 R8x.1@-295.31,641.67 R7x.1@-295.31,705 R7x.1@-296.24,705 ; R7x.1@-296.24,705 R7x.1@-296.25,705.69 ; R7x.1@-296.25,705.69 -296.25,755.75 -282.25,769.75 ; -282.25,769.75 -281.25,770.75 -135.67,770.75 -115.17,791.25 26.25,791.25 v1(102.75,714.75) 131.72,685.78 131.72,643.22 118.25,629.75 18.75,629.75 -28.25,582.75 -72.75,582.75 -106.75,616.75 -141.25,616.75 -154.68,630.18 R6x.1@-154.68,641.67 R5x.1@-154.68,705 -218,705 -231.25,718.25 -231.25,756.75 -244.25,769.75 -282.25,769.75
  Bottom Layer w6: v1(-813.25,923.75) 199.75,923.75 243.25,880.25 243.25,855.25 ; v1(102.75,714.75) 243.25,855.25 ; v1(690.75,738.75) 696.75,744.75 696.75,918.75 656.75,958.75 346.75,958.75 243.25,855.25
NetR1_2: R1.2 SIGX.1 U1.1 | length 1108.8
  Top Layer w6: R1.2@-744.69,385 -744.69,404.75 -693.39,456.05 U1.1@-693.39,488.31 -693.39,531.88 -754.25,592.75 -754.25,788.75 -732.25,810.75 -732.25,855.75 -719.25,868.75 -188.75,868.75 SIGX.1@-165,845
NetR1x_2: R1x.2 R1y.1 SIG1.1 | length 227.6
  Top Layer w6: R1x.2@829.69,705 v1(885.32,705)
  Bottom Layer w6: SIG1.1@773.16,669.29 849.61,669.29 v1(885.32,705) R1y.1@885.32,660
NetR1y_2: R1y.2 R9.1 R9y.1 R17y.1 R25y.1 R33y.1 R41y.1 R49y.1 R57y.1 U5.2 | length 7073.7
  Top Layer w6: R9.1@689.69,-885 706.46,-885 722.2,-869.25 v1@722.2,-835.34 ; v1(721.75,-835.8) v1@722.2,-835.34 ; U5.2@722.2,-781.69 v1@722.2,-835.34
  Bottom Layer w6: v1(721.75,-835.8) 536.56,-835.8 424,-723.23 424,-642.25 434.75,-631.5 434.75,-605.25 ; R57y.1@924.69,-427.33 924.69,-404.25 923.69,-403.25 730.75,-403.25 ; R41y.1@924.69,-116.67 943.25,-116.67 955.75,-129.17 955.75,-212.19 ; R33y.1@924.69,38.67 924.69,19.69 914.75,9.75 720.75,9.75 719.75,10.75 719.75,151.75 ; R9y.1@924.69,504.67 924.69,522.81 905.75,541.75 ; R1y.2@924.69,660 924.69,649.75 ; 434.75,-605.25 434.75,-592.25 449.75,-577.25 462.75,-577.25 ; 434.75,-605.25 369.25,-670.75 369.25,-869.25 399.25,-899.25 875.75,-899.25 1003.75,-771.25 1003.75,632.75 986.75,649.75 924.69,649.75 ; 434.75,-605.25 462.75,-577.25 ; 462.75,-577.25 469.75,-570.25 518.25,-570.25 531.75,-556.75 ; 462.75,-577.25 518.25,-577.25 531.75,-563.75 531.75,-556.75 ; 531.75,-556.75 531.75,-506.75 ; 531.75,-506.75 531.75,-494.25 550.75,-475.25 563.25,-475.25 ; 531.75,-506.75 563.25,-475.25 ; 563.25,-475.25 563.93,-474.57 683.84,-474.57 697.16,-461.25 ; 563.25,-475.25 684.16,-475.25 697.16,-462.25 697.16,-461.25 ; 697.16,-461.25 697.16,-424.84 ; 697.16,-424.84 697.16,-415.25 709.16,-403.25 712.75,-403.25 ; 697.16,-424.84 712.75,-409.25 712.75,-403.25 ; 712.75,-403.25 712.75,-385.25 ; 712.75,-403.25 730.75,-403.25 ; 712.75,-385.25 712.75,-331.25 ; 712.75,-385.25 730.75,-403.25 ; 712.75,-331.25 712.75,-330.22 717.72,-325.25 718.75,-325.25 ; 712.75,-331.25 718.75,-325.25 ; 718.75,-325.25 906.19,-325.25 ; 719.75,151.75 719.75,246.75 ; 719.75,151.75 733.09,165.09 921.53,165.09 924.69,168.25 R25y.1@924.69,194 924.69,222.43 905.37,241.75 724.75,241.75 719.75,246.75 ; 719.75,246.75 719.75,303.75 ; 719.75,303.75 719.75,405.75 ; 719.75,303.75 734.25,318.25 903.81,318.25 924.69,339.12 R17y.1@924.69,349.33 924.69,380.75 921.69,383.75 741.75,383.75 719.75,405.75 ; 719.75,405.75 719.75,540.75 720.75,541.75 812.75,541.75 ; 812.75,541.75 905.75,541.75 ; 812.75,541.75 861.75,590.75 ; 861.75,590.75 898.75,627.75 ; 861.75,590.75 861.75,568.25 880.25,549.75 897.75,549.75 905.75,541.75 ; 861.75,590.75 861.75,608.75 880.75,627.75 898.75,627.75 ; 898.75,627.75 920.75,649.75 924.69,649.75 ; 898.75,627.75 909.19,627.75 924.69,643.25 924.69,649.75 ; 906.19,-325.25 929.75,-325.25 955.75,-299.25 955.75,-212.19 ; 906.19,-325.25 924.69,-306.75 R49y.1@924.69,-272 924.69,-243.25 955.75,-212.19
NetR2_1: R2.1 R9x.1 R10x.1 R11x.1 R12x.1 R13x.1 R14x.1 R15x.1 R16x.1 U1.6 | length 3026.2
  Top Layer w6: U1.6@-642.2,651.69 -642.2,711.64 ; R16x.1@-295.31,515 -295.31,492.75 -281.31,478.75 v2(-241.25,478.75) ; R15x.1@-295.31,578.33 v2@-254.17,578.33 ; v2(-241.25,591.25) v2@-254.17,578.33 ; R14x.1@-154.68,515 -154.68,530.75 ; R9x.1@790.32,585 R10x.1@790.32,525 R12x.1@684.69,525 R11x.1@684.69,585 684.69,603.75 677.69,610.75 502.67,610.75 490.75,622.67 443.25,622.67 426.75,606.17 426.75,574.75 413.75,561.75 175.75,561.75 156.75,580.75 156.75,777.25 143.75,790.25 ; -642.2,711.64 -630.31,723.53 R2.1@-630.31,760 -630.31,771.75 ; -642.2,711.64 -642.2,759.86 -630.31,771.75 ; -630.31,771.75 -630.31,781.75 -629.31,782.75 -619.31,782.75 ; -630.31,771.75 -619.31,782.75 ; -619.31,782.75 -177.75,782.75 ; v2@-254.17,578.33 R13x.1@-154.68,578.33 -154.68,530.75 ; -177.75,782.75 -157.25,803.25 -147.25,803.25 ; -177.75,782.75 -167.75,782.75 -147.25,803.25 ; -154.68,530.75 -131.65,553.78 38.19,553.78 49.72,565.31 113.31,565.31 143.75,595.75 143.75,790.25 ; -147.25,803.25 130.75,803.25 143.75,790.25
  Conexiones w6: v2(-241.25,478.75) v2(-241.25,591.25)
NetR2_2: R2.2 SIGX.3 U1.7 | length 720.8
  Top Layer w6: U1.7@-667.8,651.69 -667.8,704.75 -669.69,706.64 R2.2@-669.69,760 -669.69,777.31 -651.25,795.75 -247.22,795.75 -227.72,815.25 -124.75,815.25 -115,825 SIGX.3@-115,845
NetR2x_2: R2x.2 R2y.2 SIG1.3 | length 814.9
  Top Layer w6: R2x.2@829.69,645 872,645 ; v1(957.75,620.25) 933,645 872,645 ; v1(970.25,743.25) 872,645
  Bottom Layer w6: SIG1.3@773.16,590.55 720.75,590.55 719.75,591.55 719.75,730.75 732.25,743.25 v1(970.25,743.25) ; R2y.2@895.31,582.33 895.31,600.75 896.31,601.75 939.25,601.75 v1(957.75,620.25)
NetR2y_1: R2y.1 R10.1 R10y.1 R18y.1 R26y.1 R34y.1 R42y.1 R50y.1 R58y.1 U5.6 | length 2340.5
  Top Layer w6: U5.6@747.8,-618.31 755.52,-565.53 ; v1(934.69,-578.25) 768.25,-578.25 755.52,-565.53 ; 755.52,-565.53 754.69,-564.69 R10.1@754.69,-520 755.52,-565.53
  Bottom Layer w6: v1(934.69,-578.25) R58y.1@934.69,-505 955.75,-505 957.5,-503.25 957.5,-351.25 955.91,-349.67 ; R50y.1@934.69,-349.67 955.91,-349.67 ; R42y.1@934.69,-194.33 934.69,-182.19 906.75,-154.25 726.75,-154.25 ; R26y.1@934.69,116.33 R26y.1@945.75,116.33 ; R2y.1@934.69,582.33 934.69,550.75 949.75,535.69 949.75,472.75 934.69,457.69 R10y.1@934.69,427 934.69,397.75 957.5,374.94 957.5,325.5 934.69,302.69 R18y.1@934.69,271.67 949.75,271.67 950.75,270.67 950.75,117.33 949.75,116.33 R26y.1@945.75,116.33 ; 719.75,-147.25 719.75,-11.25 720.75,-10.25 916.75,-10.25 ; 719.75,-147.25 719.75,-153.25 720.75,-154.25 726.75,-154.25 ; 719.75,-147.25 726.75,-154.25 ; 916.75,-10.25 934.69,-28.19 R34y.1@934.69,-39 934.69,-39.25 945.75,-39.25 945.75,-10.25 ; 916.75,-10.25 945.75,-10.25 ; 945.75,-10.25 R26y.1@945.75,116.33 ; 945.75,-10.25 956.75,-10.25 991.75,-45.25 991.75,-331.75 973.83,-349.67 955.91,-349.67
NetR3_1: R3.1 R17x.1 R18x.1 R19x.1 R20x.1 R21x.1 R22x.1 R23x.1 R24x.1 U2.2 | length 3184.8
  Top Layer w6: R23x.1@-830.31,265 R23x.1@-830.25,265 ; v2(-735.19,229.69) -830.25,228.62 ; R22x.1@-709.68,200 R21x.1@-709.68,265 R23x.1@-830.25,265 ; U2.2@-337.8,143.31 -337.8,84.7 ; v2(-335.25,-15.25) -335.25,18.5 ; R18x.1@300.32,215 R17x.1@300.32,280 R19x.1@179.69,280 R20x.1@179.69,215 179.69,196.75 180.69,195.75 395.75,195.75 410.75,180.75 410.75,64.16 392.83,46.25 19.4,46.25 15.22,50.42 15.22,107.48 -1.05,123.75 -178.32,123.75 -195.25,140.68 -243.88,140.68 -253.25,131.31 -253.25,106.75 -274.25,85.75 -274.25,30.75 -292.25,12.75 -329.5,12.75 -335.25,18.5 ; -830.25,228.62 R23x.1@-830.25,265 ; -830.25,228.62 R24x.1@-830.31,200 -830.31,228.62 -830.25,228.62 ; -337.8,21.04 -335.25,18.5 ; -337.8,21.04 -356.75,40 R3.1@-370.31,40 -370.31,52.19 -337.8,84.7 ; -337.8,21.04 -337.8,84.7
  Conexiones w6: v2(-735.19,229.69) -509.25,3.75 -509.25,-256.75 -496.75,-269.25 -355.75,-269.25 -335.25,-248.75 v2(-335.25,-15.25)
NetR3_2: R3.2 SIGX.5 U2.1 | length 1073.5
  Top Layer w6: R3.2@-409.69,40 -409.69,48.45 v2@-387.07,71.07 ; v2(-391.25,75.25) v2@-387.07,71.07 ; U2.1@-363.39,143.31 -363.39,103.11 -386.55,71.77 v2@-387.07,71.07
  Conexiones w6: v2(-391.25,75.25) -284.77,181.73 -284.77,619.23 -215.25,688.75 -215.25,766.75 -196.89,785.11 -124.89,785.11 SIGX.5@-65,845
NetR3x_2: R3x.2 R3y.2 SIG2.1 | length 725.5
  Top Layer w6: R3x.2@645.31,705 645.31,839.31 v1(655.75,849.75)
  Bottom Layer w6: SIG2.1@300.72,669.29 344.87,669.29 346.33,670.75 346.33,674.25 336.75,683.83 336.75,743.25 349.75,756.25 423.61,756.25 425.31,754.54 425.31,743.25 ; R3y.2@425.31,670 425.31,743.25 ; v1(655.75,849.75) 561.75,755.75 437.81,755.75 425.31,743.25
NetR3y_1: R3y.1 R11.1 R11y.1 R19y.1 R27y.1 R35y.1 R43y.1 R51y.1 R59y.1 U6.2 | length 5492.4
  Top Layer w6: R11.1@304.69,-395 304.69,-355.25 327.2,-332.73 ; U6.2@327.2,-291.69 327.2,-332.73 ; v1(390.75,-355.25) 390.75,-430.68 432.25,-472.18 432.25,-513.25 418.25,-527.25 398.75,-527.25 327.2,-455.71 327.2,-332.73
  Conexiones w6: v1(-97.16,-157.25) -15.66,-238.75 274.25,-238.75 v1(390.75,-355.25)
  Bottom Layer w6: v1(-97.16,-157.25) -223.72,-157.25 -224.72,-158.25 -224.72,-231.75 -210.22,-246.25 -67.25,-246.25 -34.75,-213.75 53.25,-213.75 71.75,-195.25 71.75,-94.25 84.25,-81.75 361.25,-81.75 ; R59y.1@464.69,-450 464.69,-439.19 433.75,-408.25 433.75,-398.25 ; R51y.1@464.69,-290 464.69,-315.25 433.75,-315.25 433.75,-355.25 ; R43y.1@464.69,-130 452.75,-130 452.75,-118.25 430.75,-96.25 375.75,-96.25 361.25,-81.75 ; R35y.1@464.69,30 464.69,55.75 448.77,71.67 268.83,71.67 259.75,80.75 ; R19y.1@464.69,350 464.69,377.31 433.75,408.25 ; R11y.1@464.69,510 464.69,496.69 450.75,482.75 ; R3y.1@464.69,670 464.69,651.75 463.69,650.75 404.75,650.75 403.75,651.75 403.75,688.75 406.75,691.75 406.75,730.75 393.25,744.25 362.25,744.25 348.75,730.75 348.75,698.75 360.75,686.75 360.75,648.75 355.75,643.75 355.75,566.75 343.25,554.25 260.25,554.25 246.75,540.75 246.75,483.75 247.75,482.75 ; 247.75,482.75 245.25,482.75 244.25,483.75 244.25,524.25 226.75,541.75 68.25,541.75 45.75,519.25 45.75,409.75 36.72,400.72 36.72,298.75 52.75,282.72 52.75,180.75 65.65,167.85 222.82,167.85 224.72,169.75 224.72,209.22 243.25,227.75 440.75,227.75 464.69,203.81 R27y.1@464.69,190 464.69,168.75 463.69,167.75 272.62,167.75 235.75,130.88 235.75,104.75 259.75,80.75 ; 247.75,482.75 359.25,482.75 ; 259.75,80.75 247.75,68.75 246.75,-75.25 361.25,-81.75 ; 359.25,482.75 433.75,408.25 ; 359.25,482.75 450.75,482.75 ; 433.75,-398.25 v1(390.75,-355.25) 433.75,-355.25 ; 433.75,-398.25 433.75,-355.25 ; 433.75,408.25 433.75,465.75 450.75,482.75
NetR4_1: R4.1 R25x.1 R26x.1 R27x.1 R28x.1 R29x.1 R30x.1 R31x.1 R32x.1 U2.6 | length 1778.3
  Top Layer w6: R32x.1@-830.31,70 -830.31,123 ; R31x.1@-830.31,135 -830.31,123 ; R30x.1@-709.68,70 R29x.1@-709.68,135 ; R4.1@-300.31,410 -300.31,369.31 ; v2(-224.25,215.75) -8.25,215.75 36.75,170.75 159.25,170.75 162.75,167.25 162.75,151 163.75,150 R27x.1@179.69,150 R28x.1@179.69,80 236.75,80 241.75,85 R26x.1@300.32,85 R25x.1@300.32,150 ; v2(-224.25,344.25) -230.75,350.75 -281.75,350.75 -300.31,369.31 ; -830.31,123 -818.31,135 R29x.1@-709.68,135 ; R29x.1@-709.68,135 -709.68,143.25 -697.18,155.75 -679.25,155.75 -577.25,257.75 -313.2,257.75 U2.6@-312.2,306.69 -312.2,351.75 -300.31,363.64 -300.31,369.31
  Conexiones w6: v2(-224.25,215.75) v2(-224.25,344.25)